# Altium PCB HVPSV3_GaN_system_5_5V_v2.PcbDoc (part 1 of 3)
Units mil, origin at the board's own origin, x right, y up, seen from the top; angles counter-clockwise.
Board outline 3914 x 4092 mil, 4 copper layers (Top Layer, Internal Plane 1, Internal Plane 2, Bottom Layer); 212 components, 159 nets, 925 pads, 655 vias.
Unrouted connection lines stored in the file: 4.
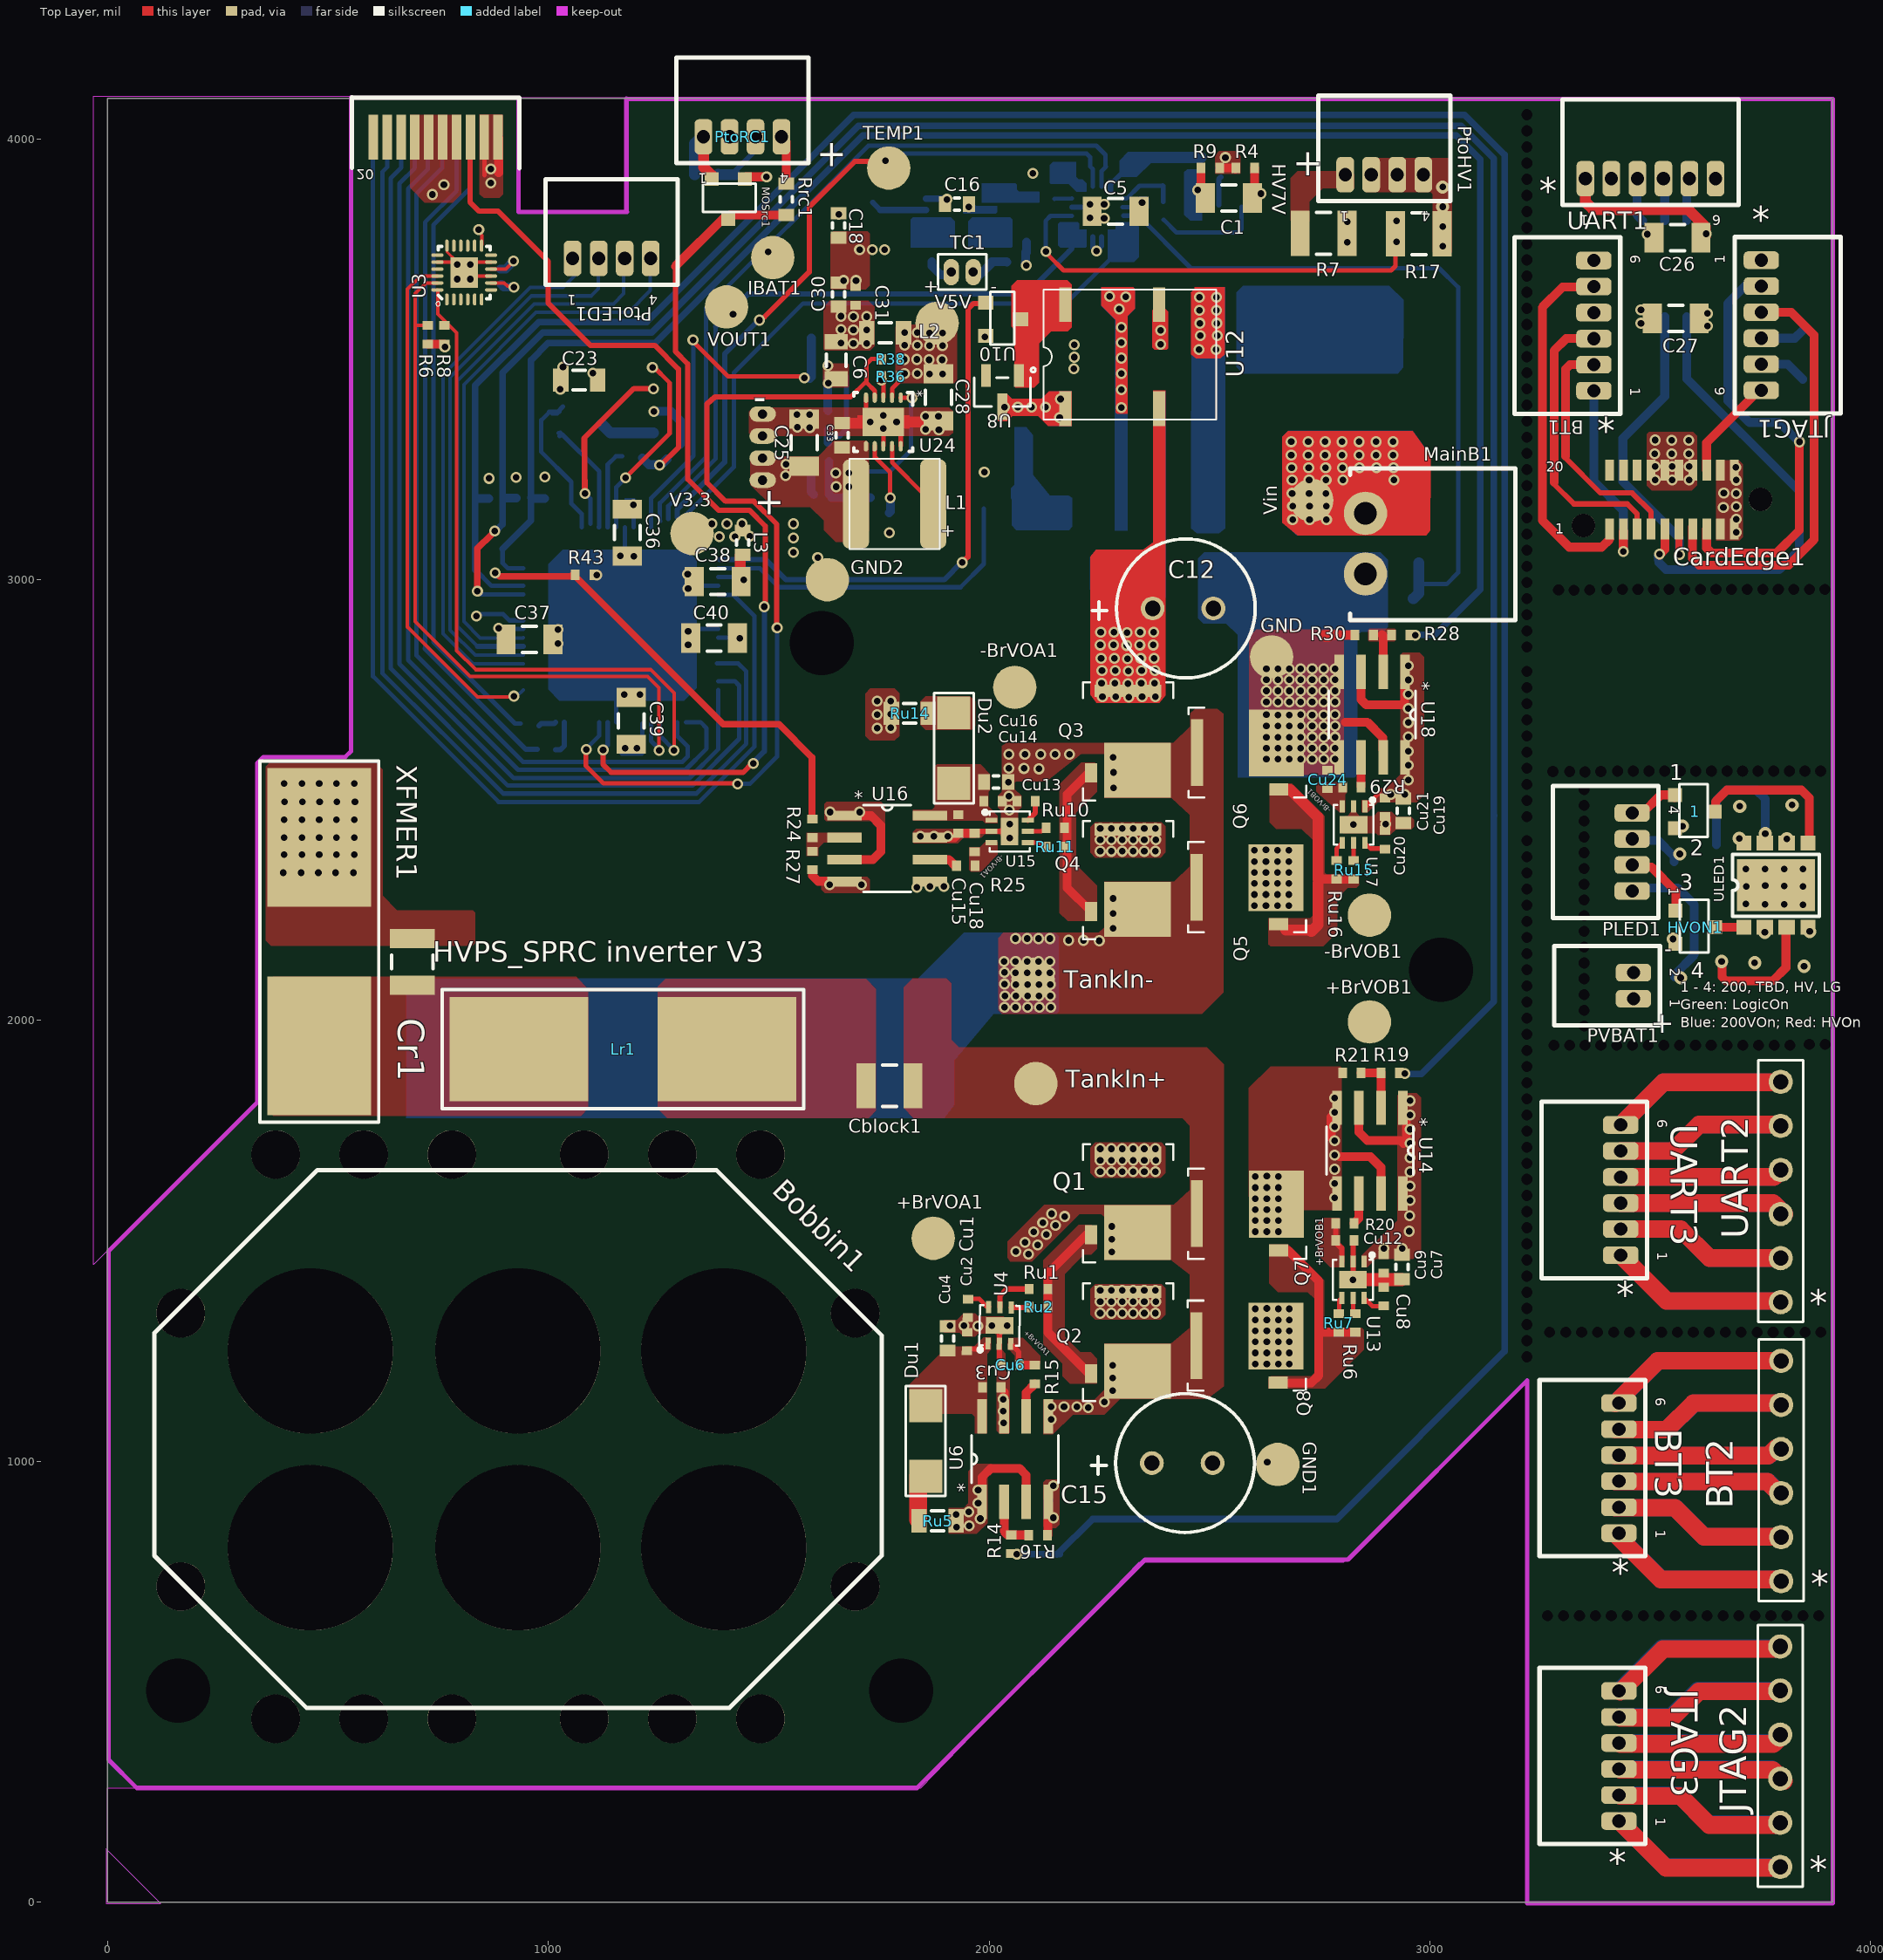
[diagram p0: Top Layer view]
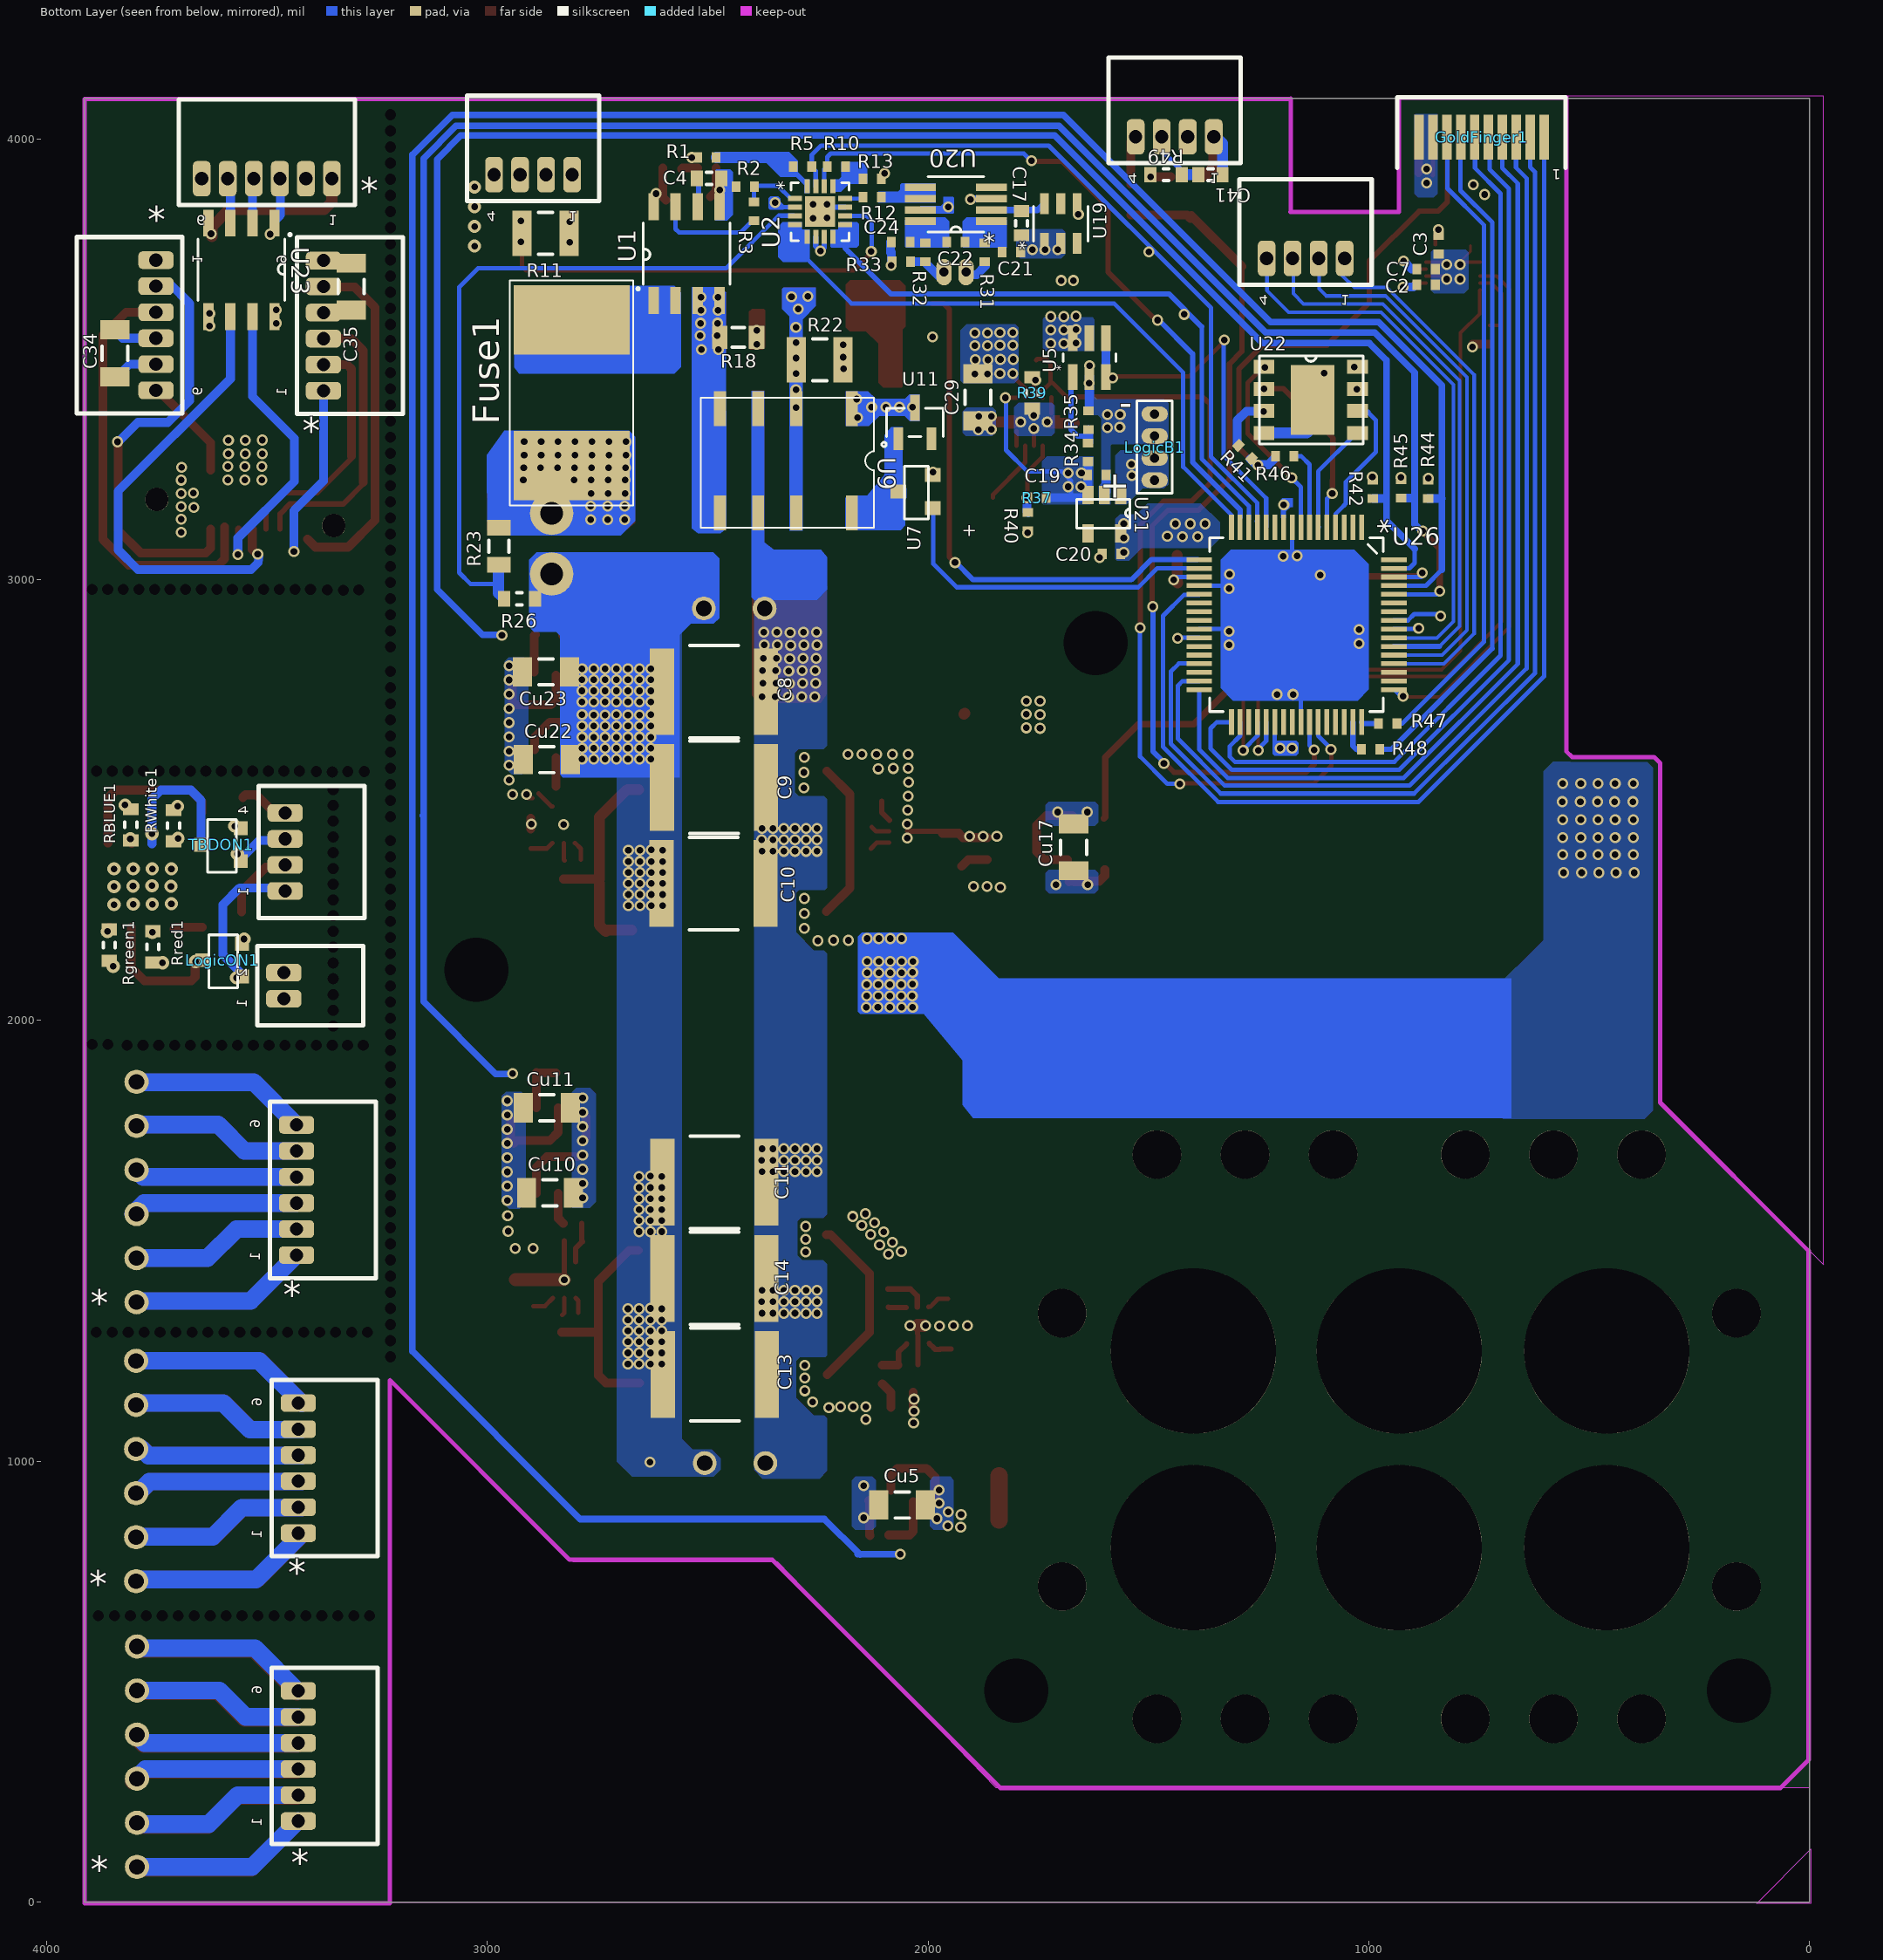
[diagram p1: Bottom Layer view, seen from below]
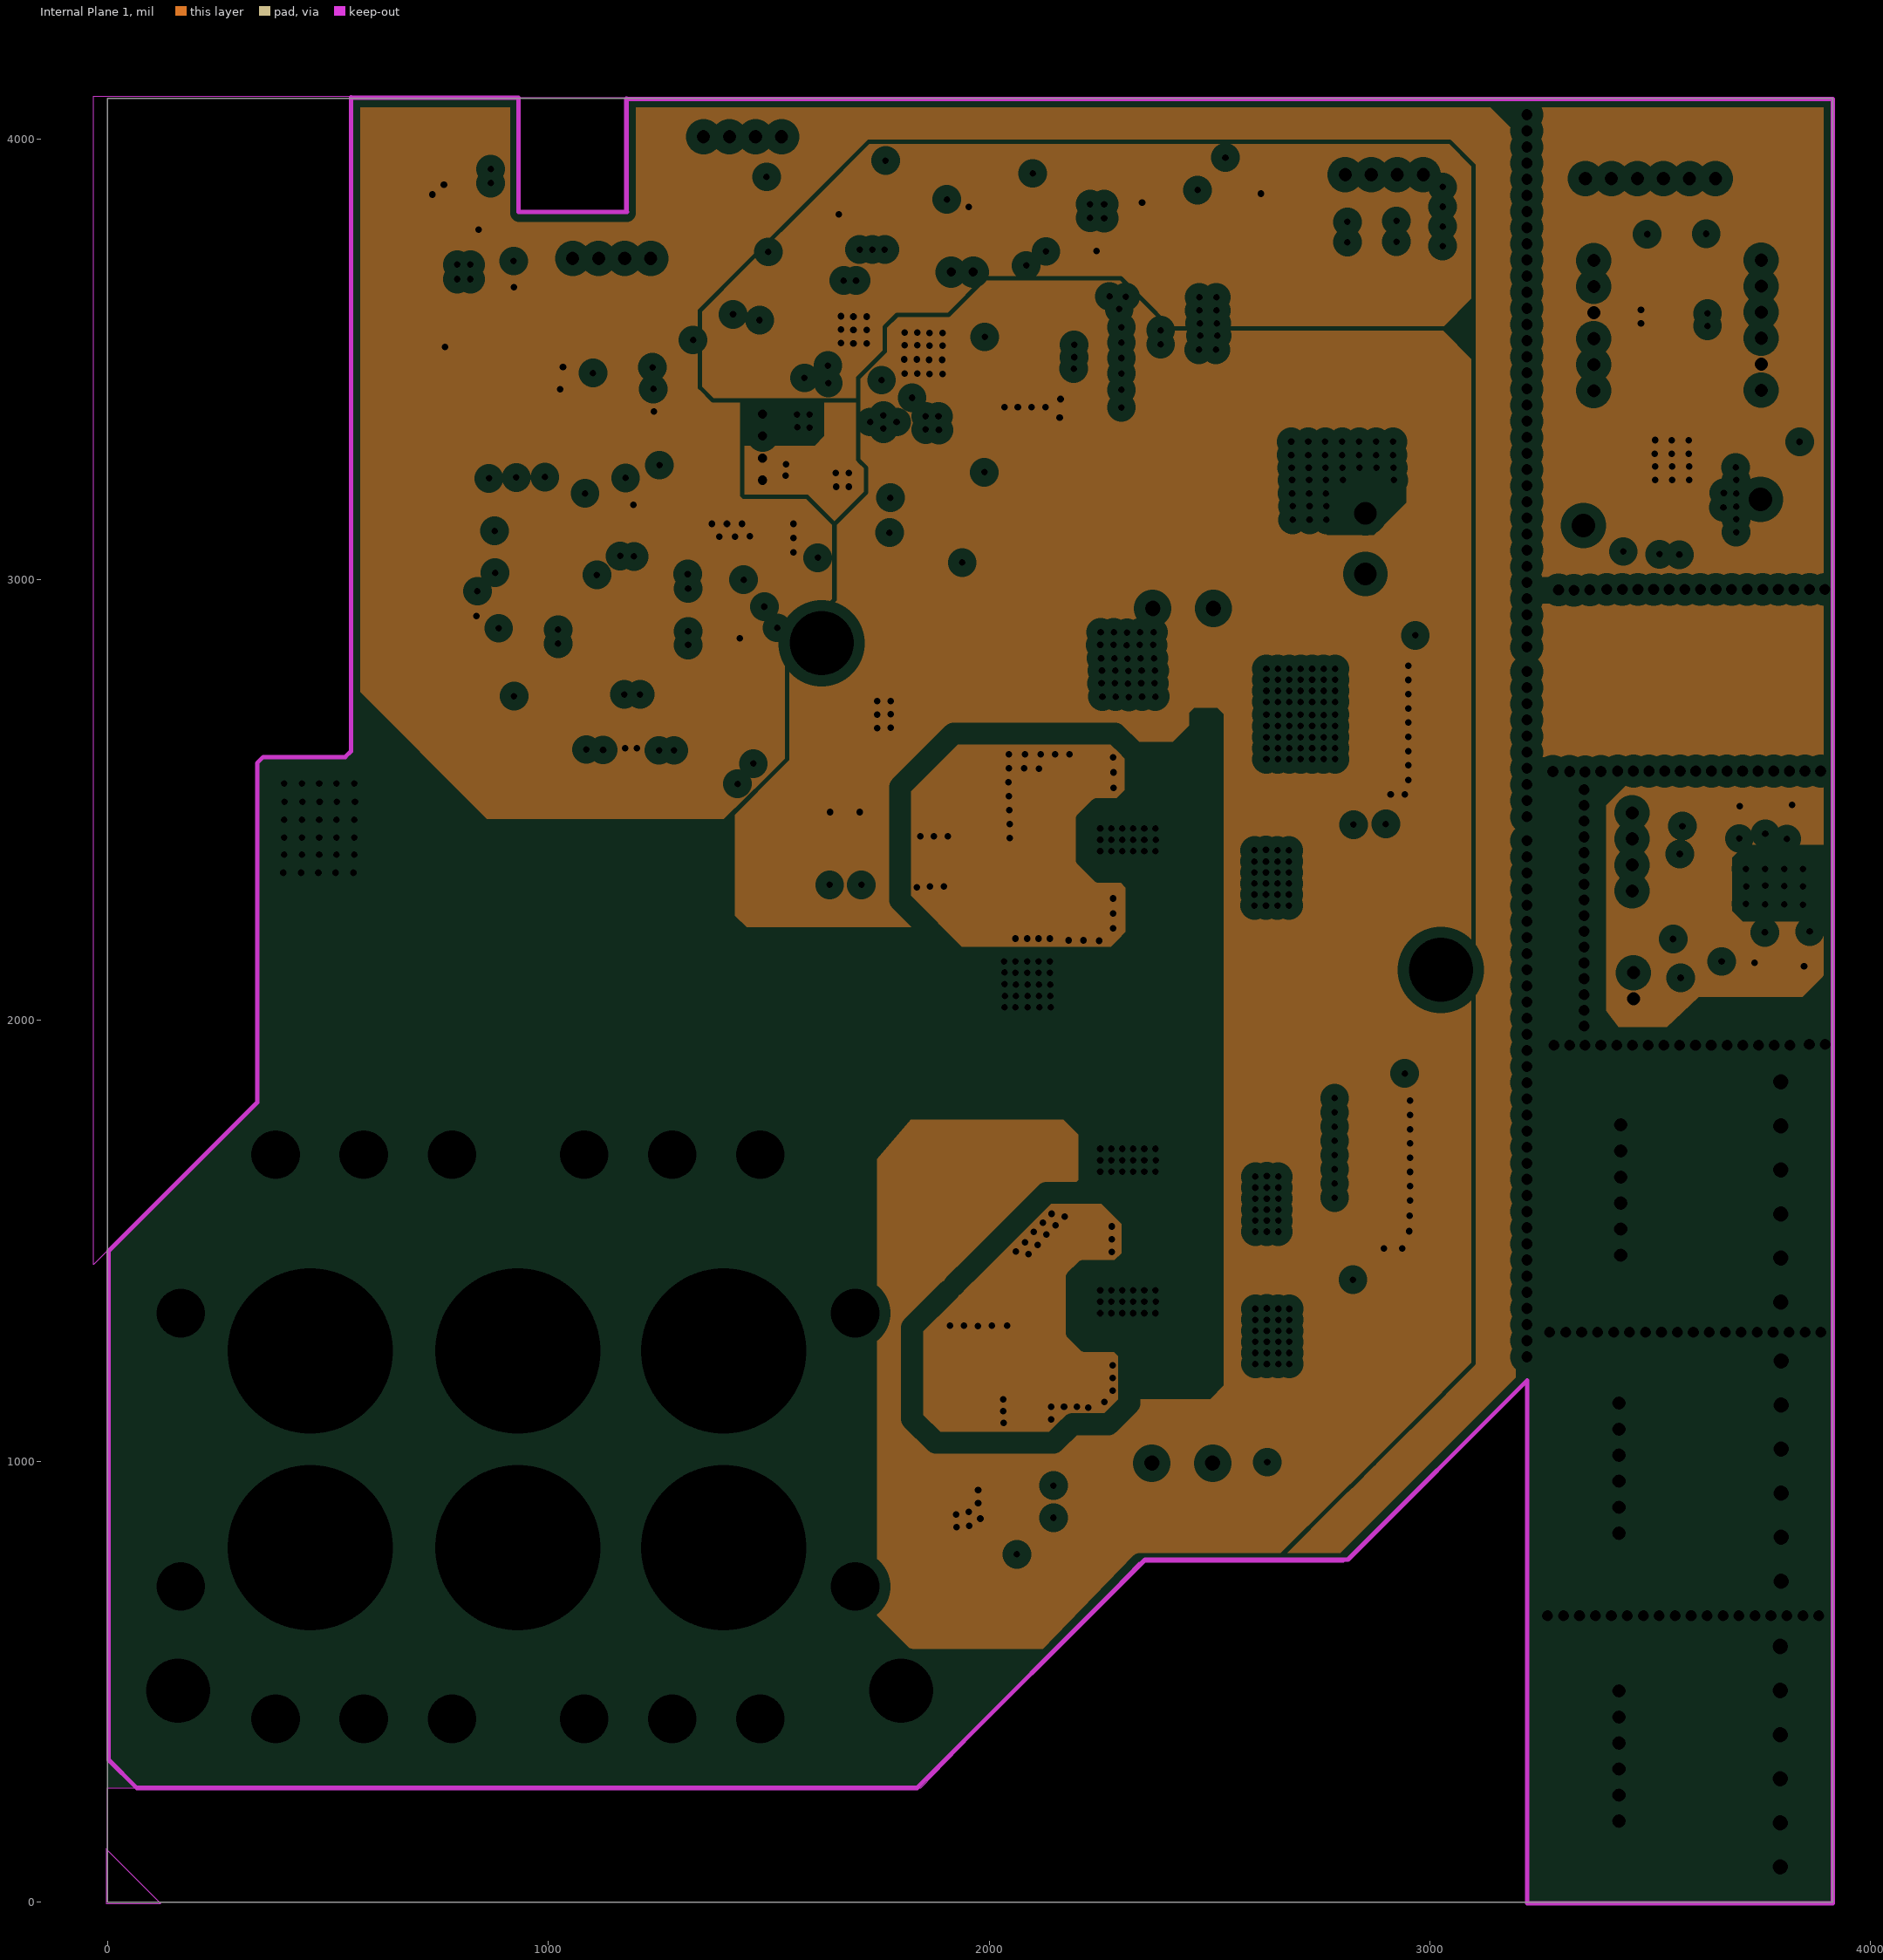
[diagram p2: Internal Plane 1, clearances drawn from the general rule]
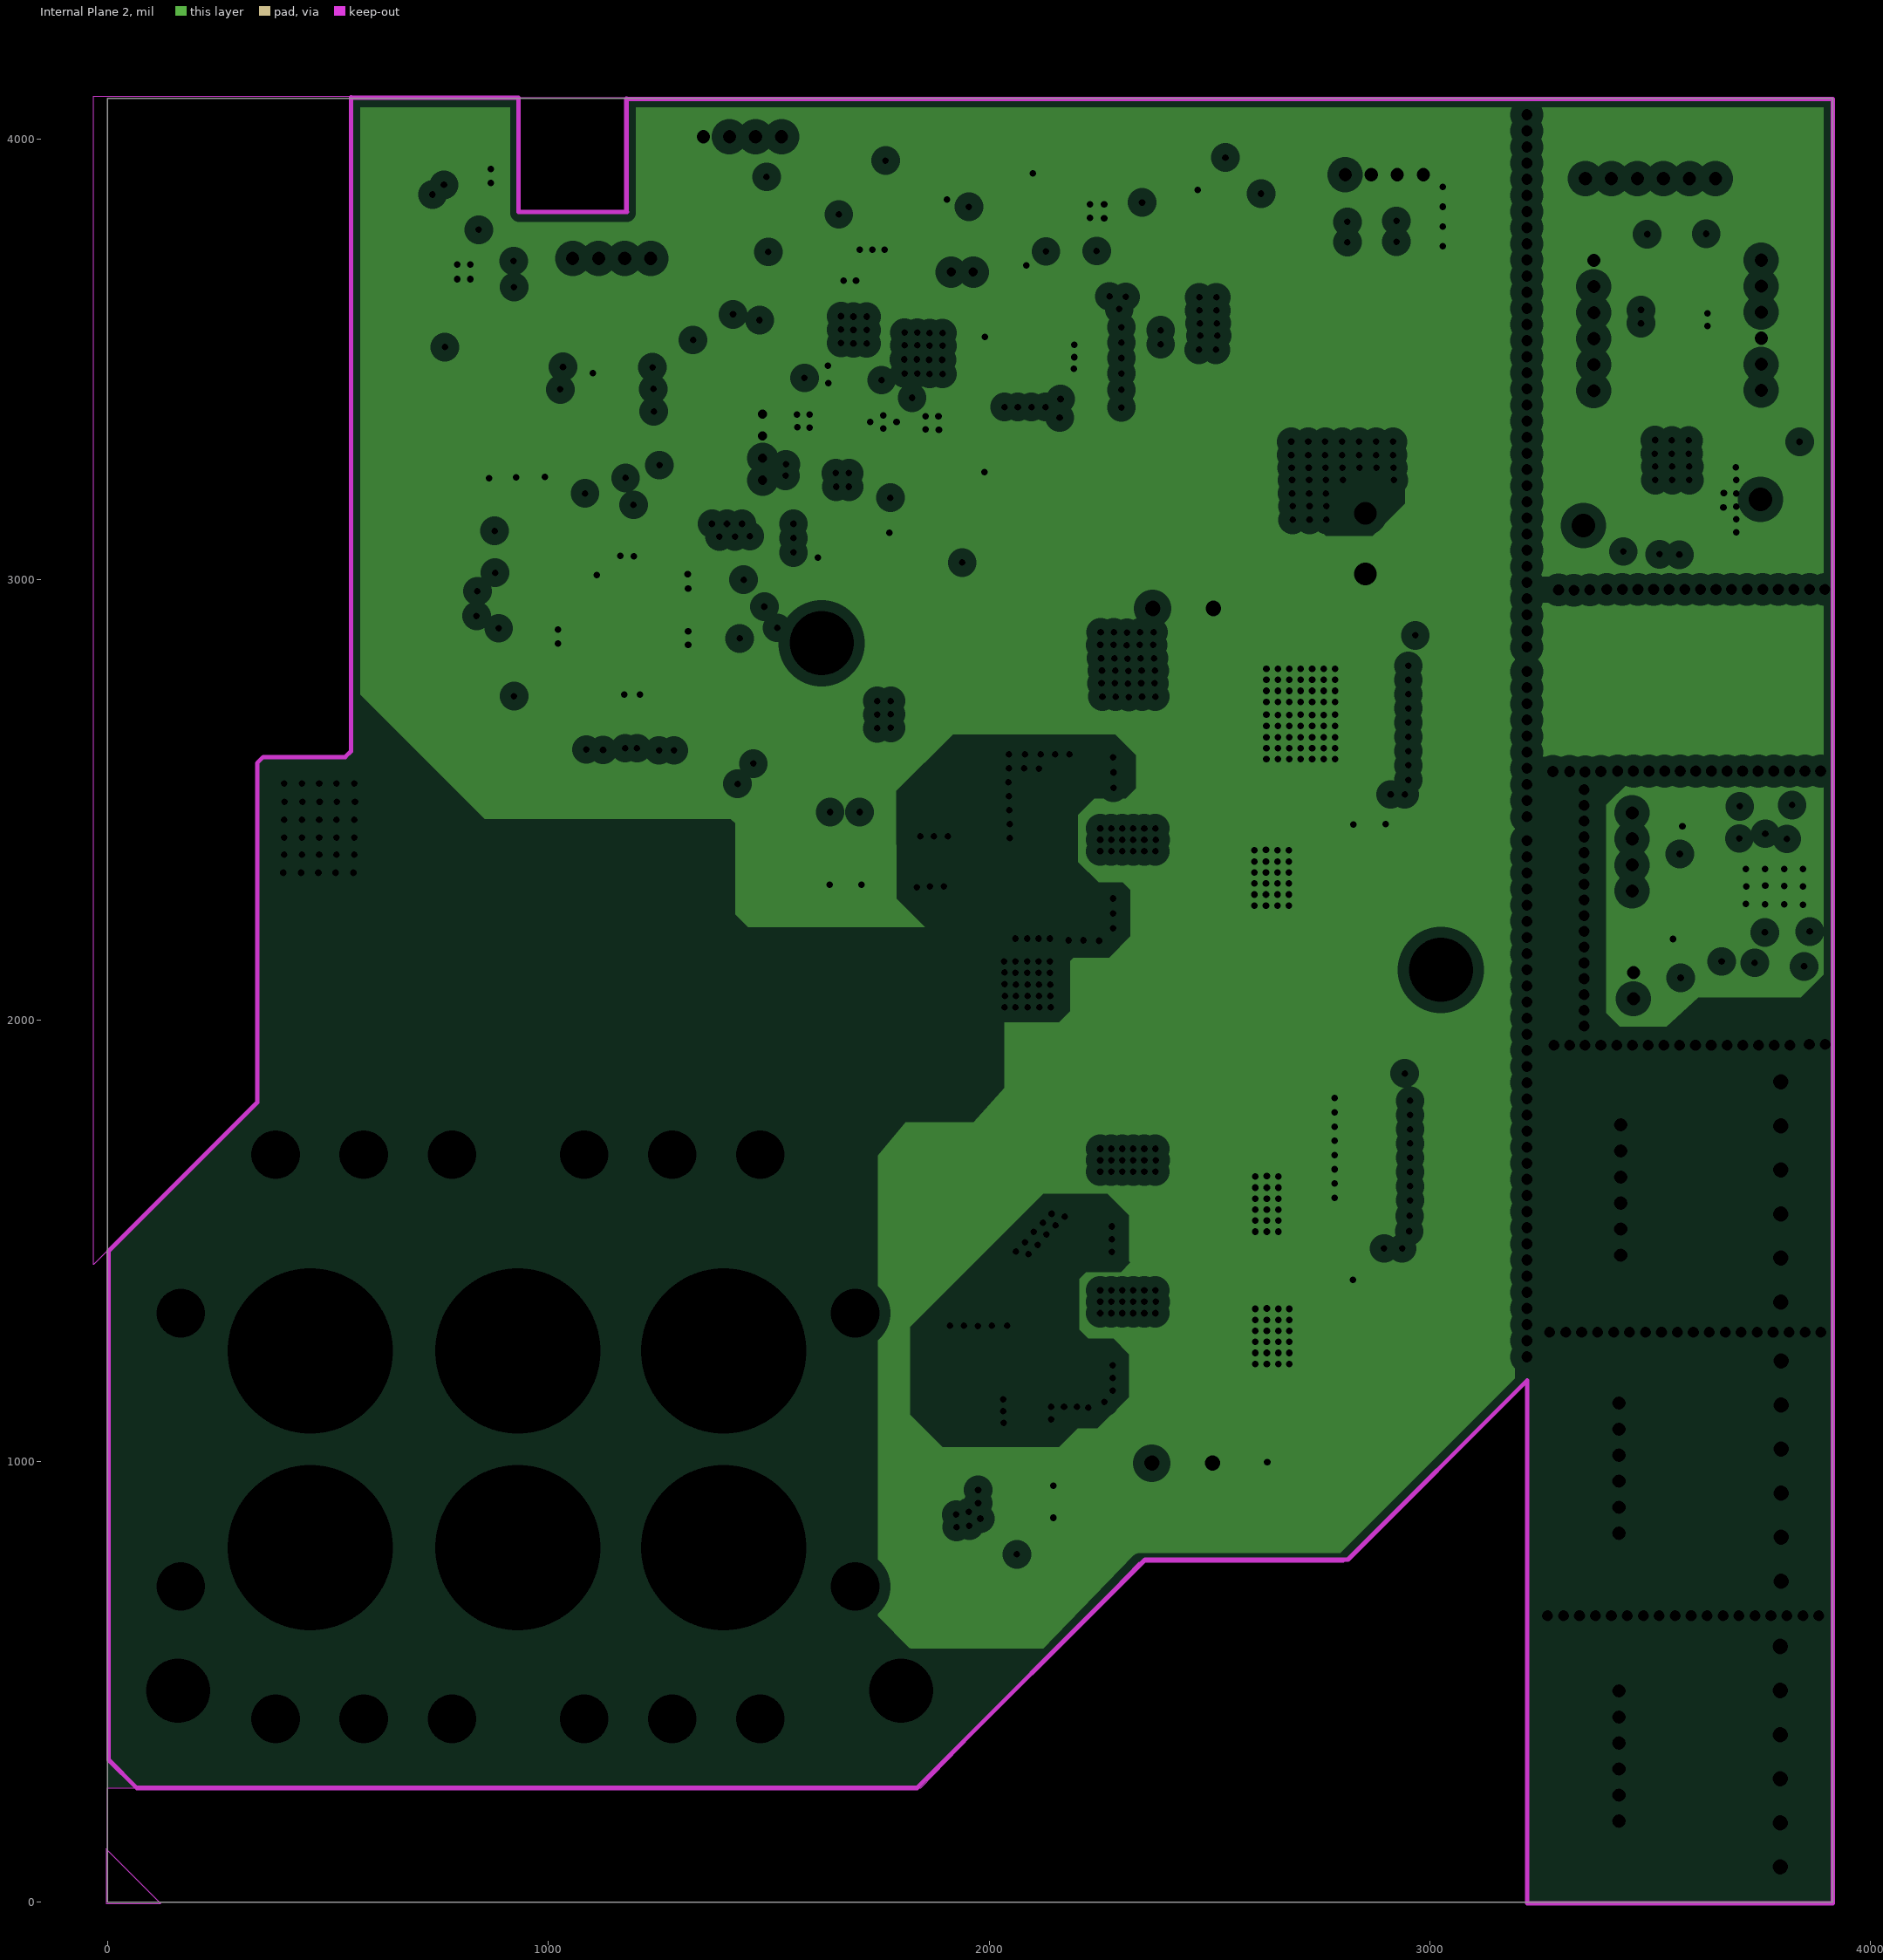
[diagram p3: Internal Plane 2, clearances drawn from the general rule]

## Layer stack, top to bottom
Top Solder: solder mask 0.4, Solder Resist, Dk 3.5
Top Layer: signal copper 1.4
Dielectric1: core 12.6, FR-4, Dk 4.8
Internal Plane 1: plane copper 1.4, net (Multiple Nets)
Dielectric3: core 12.6, FR-4, Dk 4.8
Internal Plane 2: plane copper 1.4, net (Multiple Nets)
Dielectric2: prepreg 12.6, FR-4, Dk 4.8
Bottom Layer: signal copper 1.4
Bottom Solder: solder mask 0.4, Solder Resist, Dk 3.5

## Board outline
0,0 0,4092 2395,4092 3914,4092 3914,0 2395,0
cut-out: -3,-3 120,-3 -3,120
cut-out: 553,2607 540,2594 352,2594 339,2581 339,1817 -32,1446 -32,4097 553,4097
cut-out: 1845,0 0,0 0,258.83 1845,258.83 2340.92,772 2805,772 3221,1188 3221,0 2291,0
cut-out: 933,3832 1178,3832 1178,4093 933,4093

## Design rules (kind name [scope] priority, off if disabled: settings)
Clearance "Clearance Polygon" [InPolygon] p1: gap=6 ignorepadtopadclearanceinfootprint=FALSE except(0: Arc-Hole Track-Hole SMDPad-Hole THPad-Hole Via-Hole Fill-Hole Poly-Hole Region-Hole Text-Hole)
Clearance [All] p2: gap=6 ignorepadtopadclearanceinfootprint=FALSE except(0: Arc-Hole Track-Hole SMDPad-Hole THPad-Hole Via-Hole Fill-Hole Poly-Hole Region-Hole Text-Hole)
ComponentClearance [All] p1: gap=0 collisioncheckmode=3 verticalgap=0 showdistances=FALSE
Height [All] p1: minheight=0 maxheight=1181.1 prefheight=1000
HoleSize [All] p1: absolutevalues=TRUE maxlimit=400 minlimit=10 maxpercent=80.000 minpercent=20.000
HoleToHoleClearance [All] p1: gap=6 allowstackedmicrovias=TRUE
MinimumAnnularRing [All] p1: minimumring=5
MinimumSolderMaskSliver [All] p1: minsoldermaskwidth=1
PasteMaskExpansion [All] p1: expansion=5
PlaneClearance [All] p1: clearance=25
PlaneConnect [All] p1: planeconnectstyle=Direct reliefexpansion=20 reliefentries=4 reliefconductorwidth=10 reliefairgap=10
PolygonConnect [All] p1: connectstyle=Direct reliefconductorwidth=10 reliefentries=4 polygonreliefangle="90 Angle" airgapwidth=10
RoutingVias [All] p1: holewidth=28 width=50 viastyle="Through Hole" minholewidth=28 minwidth=50 maxholewidth=28 maxwidth=50
SilkToSilkClearance [All] p1: silktosilkclearance=1
SilkToSolderMaskClearance [IsPad] p1: minsilkscreentomaskgap=0 clearancetoexposedcopper=TRUE
SolderMaskExpansion [All] p1: expansion=4
Width [All] p1: maxlimit=100 minlimit=6 preferedwidth=10
20 further rules are at their usual default settings.

## Components (designator, comment, footprint, x,y, rotation, side; value= is the part's Value field where it differs from the comment)
1 "MOSFET 20V 1.3 A" "SOT23 SUPER" 3555.84,2436.6 r180 top
+BrVOA1 "1508-0-57-15-00-00-03-0" TestPoint-MillMaxPin 1873,1506 r270 top
+BrVOB1 "1508-0-57-15-00-00-03-0" TestPoint-MillMaxPin 2863,1997 r270 top
-BrVOA1 "1508-0-57-15-00-00-03-0" TestPoint-MillMaxPin 2058,2756 r270 top
-BrVOB1 "1508-0-57-15-00-00-03-0" TestPoint-MillMaxPin 2863,2239 r270 top
Bobbin1 "Bobbin 2 end" "RM14 Bobbin - shrink" 931,356 r180 top
BT1 "6Pin" "S6B-ZR CONNECTOR" 3372,3576.64 r270 top
BT2 "6Pin" "6 pin Terminal - pitch 2.54mm" 3797,1228 r90 top
BT3 "6Pin" "S6B-ZR CONNECTOR" 3429,984.53 r270 top
C1 "0.1u" C1206 2544,3866 r180 top value=Value
C2 "0.1u" CAP0402 870,3669 r180 bottom value=Value
C3 "10n" CAP0402 842,3760 r270 bottom value=Value
C4 "0.1u" CAP0603 2497,3911 r180 bottom value=Value
C5 "0.1u" C1206 2287,3836 r180 top value=Value
C6 "0.1u" IND0805 1653,3498 r270 top value=Value
C7 "0.1u" CAP0402 870,3705 r180 bottom value=Value
C8 "1u" C2220 2486,2746 r0 bottom value=Value
C9 "1u" C2220 2486,2529 r0 bottom value=Value
C10 "1u" C2220 2487,2311 r0 bottom value=Value
C11 "1u" C2220 2485,1633 r0 bottom value=Value
C12 "CapEle" "ELECCAP - 3.5 MM SPACE" 2508.8,2935 r180 top value="NO NEED"
C13 "1u" C2220 2484,1197 r0 bottom value=Value
C14 "1u" C2220 2485,1415 r0 bottom value=Value
C15 "CapEle" "ELECCAP - 3.5 MM SPACE" 2507,996 r180 top value="NO NEED"
C16 "0.1u" CAP0603 1927,3852 r180 top value=Value
C17 "1u" CAP0603 1788,3809 r270 bottom value=Value
C18 "0.1u" CAP0603 1658,3804 r270 top value=Value
C19 "1u" CAP0402 1617,3238 r180 bottom value=Value
C20 "1u" CAP0402 1584,3059 r0 bottom value=Value
C21 "10n" CAP0402 1811,3743 r0 bottom value=Value
C22 "0.1u" CAP0402 1937,3766 r0 bottom value=Value
C23 "0.1u" IND0805 1070,3453 r0 top value=Value
C24 "10n" CAP0402 2062,3766 r0 bottom value=Value
C25 "22u" C1206 1580,3311 r90 top
C26 "47n" C1206 3562,3776 r180 top value=Value
C27 "47n" C1206 3558,3593 r0 top value=Value
C28 "2.2u" C1206 1885,3414 r270 top value=Value
C29 "68u" C1206 1887,3414 r270 bottom value=Value
C30 "0.1u" CAP0603 1658,3647 r90 top value=Value
C31 "1u" CAP0402 1697,3644 r90 top value=Value
C33 "0.1u" CAP0603 1666,3328 r90 top value=Value
C34 "0.1u" C1206 3845,3513.85 r270 bottom value=Value
C35 "0.1u" C1206 3309,3665 r90 bottom value=Value
C36 "0.1u" C1206 1179,3107 r270 top value=Value
C37 "22u" C1206 957,2865 r0 top value=Value
C38 "0.1u" C1206 1384,2996 r180 top value=Value
C39 "0.1u" C1206 1188,2680 r270 top value=Value
C40 "0.1u" C1206 1376,2868 r0 top value=Value
C41 "NaN" CAP0603 1359.44,3919 r180 bottom value=Value
CardEdge1 "Card Edge 20 Pin" 3MCARDEDGE20PIN_CONNECTOR 3549.27,3182.07 r0 top
Cblock1 "19.6nF" C1210 1774,1852 r180 top value=Value
Cr1 "NO NEED" C1210 691,2133 r270 top value=Value
Cu1 "2.2u" 0402 1952,1347 r269 top value=Value
Cu2 "2.2u" 0402 1950,1272 r89 top value=Value
Cu3 "0.1u" CAP0402 2006,1168 r0 top value=Value
Cu4 "10u" CAP0603 1906,1279 r90 top value=Value
Cu5 "0.1u" C1206 2059,901 r0 bottom value=Value
Cu6 "NaN" 0402 2048,1219 r179 top value=Value
Cu7 "10u" CAP0603 2937,1441 r270 top value=Value
Cu8 "2.2u" 0402 2895,1374 r90 top value=Value
Cu9 "2.2u" 0402 2895,1448 r270 top value=Value
Cu10 "0.1u" C1206 2858,1609 r180 bottom value=Value
Cu11 "0.1u" C1206 2865,1802 r180 bottom value=Value
Cu12 "NaN" 0402 2807,1501 r0 top value=Value
Cu13 "2.2u" 0402 2084,2498 r180 top value=Value
Cu14 "2.2u" 0402 2009,2498 r0 top value=Value
Cu15 "0.1u" CAP0402 1930,2446 r270 top value=Value
Cu16 "10u" CAP0603 2016,2541 r0 top value=Value
Cu17 "0.1u" C1206 1670,2393 r270 bottom value=Value
Cu18 "NaN" 0402 1967,2404 r90 top value=Value
Cu19 "10u" CAP0603 2940,2476 r270 top value=Value
Cu20 "2.2u" 0402 2898,2410 r90 top value=Value
Cu21 "2.2u" 0402 2898,2484 r270 top value=Value
Cu22 "0.1u" C1206 2865,2592 r180 bottom value=Value
Cu23 "0.1u" C1206 2867,2791 r180 bottom value=Value
Cu24 "NaN" 0402 2768,2547 r90 top value=Value
Du1 "Diode RF101LAM4S" SBR1U400P1 1856,966 r270 top
Du2 "Diode RF101LAM4S" SBR1U400P1 1920,2698 r90 top
Fuse1 "04853.15DR" LITTLEFUSE462 2809,3424 r270 bottom
GND "1508-0-57-15-00-00-03-0" TestPoint-MillMaxPin 2641,2825 r0 top
GND1 "1508-0-57-15-00-00-03-0" TestPoint-MillMaxPin 2655,993 r90 top
GND2 "1508-0-57-15-00-00-03-0" TestPoint-MillMaxPin 1633,3000 r90 top
GoldFinger1 "Card Edge 20 Pin" 3MCARDEDGE20PIN_BOARD 744.27,4004 r0 bottom
HVON1 "MOSFET 20V 1.3 A" "SOT23 SUPER" 3557,2174.2 r180 top
IBAT1 "1508-0-57-15-00-00-03-0" TestPoint-MillMaxPin 1509,3731 r90 top
JTAG1 "6Pin" "S6B-ZR CONNECTOR" 3752,3577.53 r90 top
JTAG2 "6Pin" "6 pin Terminal - pitch 2.54mm" 3795,580 r90 top
JTAG3 "6Pin" "S6B-ZR CONNECTOR" 3429,331.47 r270 top
L1 "Inductor" SD25inductor 1785.4,3172 r0 top value=10u
L2 "10u" IND0805 1764,3560 r180 top value=Value
L3 "68nH" CAP0603 1441,3084 r270 top value=Value
LogicB1 "GRPB041VWCN-RC" "4 PIN TERMINAL - PITCH 1.27MM - RIGHT ANGLE" 1486,3126 r270 bottom
LogicON1 "MOSFET 20V 1.3 A" "SOT23 SUPER" 3556.84,2174.4 r180 bottom
Lr1 "Inductor" ExtInductor 1169,1935 r0 top value="33.2uH 6Apk"
MainB1 "0395021002" "Molex 395001002" 2854,3013 r90 top
MOSrc1 "MOSFET 20V 1.3 A" "SOT23 Super" 1370.6,3909.16 r90 top
PLED1 "S4B-ZR(LF)(SN)" "S4B-ZR CONNECTOR" 3459,2382.53 r270 top
PtoHV1 "S4B-ZR(LF)(SN)" "S4B-ZR CONNECTOR" 2896.42,3919 r180 top
PtoLED1 "S4B-ZR(LF)(SN)" "S4B-ZR CONNECTOR" 1143.47,3729 r180 top
PtoRC1 "S4B-ZR(LF)(SN)" "S4B-ZR connector" 1440.42,4005 r180 top
PVBAT1 "2Pin" "S2B-ZR CONNECTOR" 3462,2079 r270 top
Q1 "GS66504B-E01-MR" GS66504B 2315,1585.26 r0 top
Q2 "GS66504B-E01-MR" GS66504B 2315,1270.26 r0 top
Q3 "GS66504B-E01-MR" GS66504B 2315,2633.43 r0 top
Q4 "GS66504B-E01-MR" GS66504B 2315,2318.43 r0 top
Q5 "GS66504B-E01-MR" GS66504B 2585.25,2302.35 r90 top
Q6 "GS66504B-E01-MR" GS66504B 2586,2608 r90 top
Q7 "GS66504B-E01-MR" GS66504B 2585.74,1562 r90 top
Q8 "GS66504B-E01-MR" GS66504B 2584.74,1262.35 r90 top
R1 "Res" RES0402 2502,3958 r180 bottom value=33.2k
R2 "Res" RES0402 2415,3892 r0 bottom value=100k
R3 "Res" RES0402 2395,3836 r90 bottom value=33.2k
R4 "Res" RES0402 2581,3934 r0 top value=180k
R5 "Res" RES0402 2285,3937 r180 bottom value=100k
R6 "Res" RES0402 726,3556 r270 top value=10k
R7 "Res" C1210 2759,3786 r180 top value=3.01Mohm
R8 "Res" RES0402 764,3556 r270 top value=10k
R9 "Res" RES0402 2502,3934 r0 top value=180k
R10 "Res" RES0402 2208,3937 r180 bottom value=0
R11 "Res" C1210 2868,3786 r180 bottom value=3.01Mohm
R12 "Res" RES0402 2127,3868 r180 bottom value=0
R13 "Res" RES0402 2127,3910 r0 bottom value=NaN
R14 "Res" RES0402 2050,812 r90 top value=0
R15 "Res" RES0402 2104,1197 r90 top value=0
R16 "Res" RES0402 2111,832 r180 top value=NaN
R17 "Res" C1210 2975,3785 r180 top value=3.01Mohm
R18 "Res" IND0805 2431,3550 r0 bottom value=20k
R19 "Res" RES0402 2910,1881 r180 top value=0
R20 "Res" RES0402 2807,1540 r180 top value=0
R21 "Res" RES0402 2823,1881 r0 top value=NaN
R22 "Res" C1210 2246,3499 r0 bottom value=2M
R23 "Res" IND0805 2974,3076 r90 bottom value=499k
R24 "Res" RES0402 1599,2436 r270 top value=0
R25 "Res" RES0402 1947,2351 r0 top value=0
R26 "Res" RES0603 2927,2957 r0 bottom value=4.99k
R27 "Res" RES0402 1599,2363 r90 top value=NaN
R28 "Res" RES0402 2934,2875 r180 top value=0
R29 "Res" RES0402 2823,2529 r180 top value=0
R30 "Res" RES0402 2851,2875 r0 top value=NaN
R31 "Res" RES0402 1872,3743 r90 bottom value=100
R32 "Res" RES0402 2006,3743 r90 bottom value=100
R33 "Res" RES0402 2061,3722 r180 bottom value=1M
R34 "Res" RES0402 1637,3289 r270 bottom value=390k
R35 "Res" RES0402 1636,3362 r270 bottom value=390k
R36 "Res" RES0402 1777,3461 r0 top value=1.8M
R37 "Res" RES0402 1753,3186 r180 bottom value=1.91M
R38 "Res" RES0402 1777,3500 r0 top value=1M
R39 "Res" RES0603 1764,3424 r90 bottom value=180k
R40 "Res" RES0402 1774,3132 r90 bottom value=390k
R41 "Res" RES0402 1281,3290 r45 bottom value=10k
R42 "Res" RES0402 991,3205 r90 bottom value=100k
R43 "Res" RES0402 1082,3011 r0 top value=100k
R44 "Res" RES0402 865,3205 r90 bottom value=100k
R45 "Res" RES0402 927,3206 r90 bottom value=100k
R46 "Res" RES0402 1191,3280 r0 bottom value=220
R47 "Res" RES0402 957,2674 r180 bottom value=49.9ohm
R48 "Res" RES0402 996,2615 r180 bottom value="49.9 ohm"
R49 "Res" RES0603 1460,3919 r0 bottom value=0
RBLUE1 "Res" RES0603 3809,2444 r90 bottom value=270
Rgreen1 "Res" RES0603 3858,2171 r90 bottom value=270
Rrc1 "Res" RES0603 1540,3863 r90 top value=20
Rred1 "Res" RES0603 3759,2167 r90 bottom value=270
Ru1 "Res" 0402 2112,1391 r0 top value=10ohm
Ru2 "Res" 0402 2112,1350 r0 top value=10ohm
Ru5 "Res" IND0805 1883,865 r180 top value=0
Ru6 "Res" 0402 2831,1314 r270 top value=10ohm
Ru7 "Res" 0402 2793,1314 r270 top value=10ohm
Ru10 "Res" 0402 2150,2437 r0 top value=10ohm
Ru11 "Res" 0402 2150,2394 r0 top value=10ohm
Ru14 "Res" IND0805 1820,2697 r0 top value=0
Ru15 "Res" 0402 2827,2342 r270 top value=10ohm
Ru16 "Res" 0402 2788,2342 r270 top value=10ohm
RWhite1 "Res" RES0603 3712,2442 r90 bottom value=270
TankIn+ "1508-0-57-15-00-00-03-0" TestPoint-MillMaxPin 2106,1857 r90 top
TankIn- "1508-0-57-15-00-00-03-0" TestPoint-MillMaxPin 2099.7,2093.94 r90 top
TBDON1 "MOSFET 20V 1.3 A" "SOT23 SUPER" 3559.84,2436.4 r180 bottom
TC1 "0530480210" "2 PIN TERMINAL - PITCH 1.27MM - RIGHT ANGLE" 1964,3698 r0 top
TEMP1 "1508-0-57-15-00-00-03-0" TestPoint-MillMaxPin 1772,3934 r90 top
U1 "ACS712ELCTR-05B-T" SOIC-8 2548,3740 r90 bottom
U2 "ADA4691-4ACPZ-R2" CP_16_22 2245.18,3835.16 r90 bottom value=Value
U3 "MPU-9250" QFN40P300X300X105-25N 809,3697 r90 top
U4 "UCC27611DRV" WSON-N6 2023.81,1308.23 r89 top
U5 "TLV341AIDBVR" DBV6 1634,3504 r90 bottom value=Value
U6 "SI8610BB-B-IS" D8 2059,1005 r90 top value=Value
U7 "DRDC3105F-7" SOT23 1989,3237.8 r180 bottom
U8 "PLVA650A,215" "SOT23 - ZENERDIODE" 2030,3426 r180 top value=Value
U9 "9-1462038-8" GULLWING8PIN 2173,3388 r270 bottom
U10 "DRDC3105F-7" SOT23 1992.26,3553.6 r180 top
U11 "PLVA650A,215" "SOT23 - ZENERDIODE" 2030,3357 r180 bottom value=Value
U12 "1462041-7" GULLWING4PIN 2173,3388 r90 top
U13 "UCC27611DRV" WSON-N6 2825.53,1411.9 r270 top
U14 "SI8610BB-B-IS" D8 2864,1705 r270 top value=Value
U15 "UCC27611DRV" WSON-N6 2046.56,2429.06 r0 top
U16 "SI8610BB-B-IS" D8 1769,2390 r0 top value=Value
U17 "UCC27611DRV" WSON-N6 2826.82,2444.44 r270 top
U18 "SI8610BB-B-IS" D8 2869,2694 r270 top value=Value
U19 "LT6654AHS6-1.25#" TSOT-23_S6 1699,3808 r90 bottom value=Value
U20 "AD8497ARMZ" RM_8 1937,3852 r0 bottom value=Value
U21 "AP2112-3.3TRG1" SOT23-5 1562.6,3192 r270 bottom
U22 "CY15B104Q-LHX1" DFN-8PIN 1238,3483 r180 bottom
U23 "HCPL-0931" SOIC-8 3558,3703 r270 bottom
U24 "TPS61020DRCR" DRC0010A 1760,3358 r270 top value=Value
U26 "dsPIC33FJ64GS606" TQFP64_10X10MC 1164,2898 r270 bottom
UART1 "6Pin" "S6B-ZR CONNECTOR" 3500.47,3910 r180 top
UART2 "6Pin" "6 pin Terminal - pitch 2.54mm" 3796,1861 r90 top
UART3 "6Pin" "S6B-ZR CONNECTOR" 3433,1615.53 r270 top
ULED1 "00137402" LED00137402 3785,2307 r90 top
V3.3 "1508-0-57-15-00-00-03-0" TestPoint-MillMaxPin 1326,3105 r90 top
V5V "1508-0-57-15-00-00-03-0" TestPoint-MillMaxPin 1882,3582 r0 top
Vin "1508-0-57-15-00-00-03-0" TestPoint-MillMaxPin 2732,3180 r0 top
VOUT1 "1508-0-57-15-00-00-03-0" TestPoint-MillMaxPin 1404,3619 r90 top
XFMER1 "XfmerCON" ExtInductor 480,2179 r90 top

## Footprints (in the part's own frame and the unit in brackets; to place one, negate y for a bottom-side part, rotate by r counter-clockwise, add the part's x,y. Pads: shape width x height; smd on the part's side, far side on the other; paste and mask are expansions set on the pad)
"2 PIN TERMINAL - PITCH 1.27MM - RIGHT ANGLE" [mil] "Right angle, male pin"
  oval 35x60 hole 21: 1(-50,0) 2(0,0)
  silkscreen extent -80,-40 30,40, body extent -83,-7 33,322, height 102
3MCARDEDGE20PIN_BOARD [mm] "SPD08-020-RB-TR"
  rect 0.55x2.6 smd: 1(-3.6,0) 2(-2.8,0) 3(-2,0) 4(-1.2,0) 5(-0.4,0) 6(0.4,0) 7(1.2,0) 8(2,0) 9(2.8,0) 10(3.6,0)
  rect 0.55x2.6 smd far side: 11(3.6,0) 12(2.8,0) 13(2,0) 14(1.2,0) 15(0.4,0) 16(-0.4,0) 17(-1.2,0) 18(-2,0) 19(-2.8,0) 20(-3.6,0)
  silkscreen extent -4.85,-2.3 4.85,1.78, body extent -6.43,-4.98 6.17,4.32, height 3.5
3MCARDEDGE20PIN_CONNECTOR [mm] "SPD08-020-RB-TR"
  round 1.35 hole 1.35 paste+0 mask+0: 0(-5.1,-1.5) 0(5.1,0)
  rect 0.5x1.2 smd: 1(-3.6,-1.7) 2(-2.8,-1.7) 3(-2,-1.7) 4(-1.2,-1.7) 5(-0.4,-1.7) 6(0.4,-1.7) 7(1.2,-1.7) 8(2,-1.7) 9(2.8,-1.7) 10(3.6,-1.7) 11(3.6,1.7) 12(2.8,1.7) 13(2,1.7) 14(1.2,1.7) 15(0.4,1.7) 16(-0.4,1.7) 17(-1.2,1.7) 18(-2,1.7) 19(-2.8,1.7) 20(-3.6,1.7)
  body extent -6.3,-3.5 6.3,3.5, height 8
"4 PIN TERMINAL - PITCH 1.27MM - RIGHT ANGLE" [mil] "Right angle, male pin"
  oval 35x60 hole 21: 1(-250,0) 2(-200,0) 3(-150,0) 4(-100,0)
  silkscreen extent -280,-40 -70,40, body extent -281,-7 -65,365, height 94
"6 pin Terminal - pitch 2.54mm" [mil] "Right angle, male pin"
  round 55 / inner round 60 / far side round 55 hole 35: 0(-500,0) 1(-400,0) 2(-300,0) 3(-200,0) 4(-100,0) 5(0,0)
  silkscreen extent -545,-51 49,51, body extent -539,-46 49,46, height 395
0402 [mil] "Chip Resistor, 2-Leads, Body 1.0x0.5mm, IPC Medium Density"
  rect 20x23.62 smd: 1(-21,0) 2(21,0)
  body extent -21,-11 21,11, height 20
C1206 [mm] "Chip Capacitor, Body 3.2x1.6mm, IPC High Density"
  rect 1.1x1.7 smd: 1(-1.35,0) 2(1.35,0)
  silkscreen extent -0.4,-0.75 0.4,0.75, body extent -1.7,-0.9 1.7,0.9, height 1.3
C1210 [mm] "Chip Capacitor, Body 3.2x2.5mm, IPC High Density"
  rect 1.1x2.6 smd: 1(-1.35,0) 2(1.35,0)
  silkscreen extent -0.4,-1.2 0.4,1.2, body extent -1.7,-1.35 1.7,1.35, height 1.3
C2220 [mm] "Chip Capacitor, Body 5.7x5mm, IPC High Density"
  rect 1.4x5 smd: 1(-3,0) 2(3,0)
  silkscreen extent -1.4,-2.67 1.4,2.67, body extent -2.92,-2.67 2.92,2.67, height 2.5
CAP0402 [mil] "Chip Capacitor, 2-Leads, Body 1.0x0.5mm, IPC Medium Density"
  rect 20x23.62 smd: 1(-21,0) 2(21,0)
  body extent -21,-11 21,11, height 20
CAP0603 [mm] "Chip Capacitor, 2-Leads, Body 1.6x0.8mm, IPC Medium Density"
  rect 0.7x0.9 smd: 1(-0.7,0) 2(0.7,0)
  silkscreen extent -0.15,-0.35 0.15,0.35, body extent -0.82,-0.43 0.82,0.42, height 0.8
CP_16_22 [mm]
  rect 0.3x0.805 smd: 1(0.75,1.452) 2(0.25,1.452) 3(-0.25,1.452) 4(-0.75,1.452) 9(-0.75,-1.452) 10(-0.25,-1.452) 11(0.25,-1.452) 12(0.75,-1.452)
  rect 0.805x0.3 smd: 5(-1.452,0.75) 6(-1.452,0.25) 7(-1.452,-0.25) 8(-1.452,-0.75) 13(1.452,-0.75) 14(1.452,-0.25) 15(1.452,0.25) 16(1.452,0.75)
  rect 1.75x1.75 smd paste-0.862: HTAB(0,0)
  silkscreen extent -1.68,-1.68 1.68,1.68, body extent -1.65,-1.65 1.65,1.65, height 0.8
D8 [mil]
  rect 78x22 smd: 1(-97,75) 2(-97,25) 3(-97,-25) 4(-97,-75) 5(97,-75) 6(97,-25) 7(97,25) 8(97,75)
  silkscreen extent -54,-98 54,98
DBV6 [mil]
  rect 58x22 smd: 1(-44,37.4) 2(-44,0) 3(-44,-37.4) 4(44,-37.4) 5(44,0) 6(44,37.4)
  silkscreen extent -9,-60 9,60
DFN-8PIN [mm]
  rect 2.5x4 smd: 0(2.8,-1.905)
  rect 1.2x0.8 smd: 1(0,0) 2(0,-1.27) 3(0,-2.54) 4(0,-3.81) 5(5.4,-3.81) 6(5.4,-2.54) 7(5.4,-1.27) 8(5.4,0)
  silkscreen extent -0.25,-4.44 5.72,0.63, body extent -0.25,-4.44 5.72,0.63, height 0.8
DRC0010A [mm]
  oval 0.6x0.24 smd paste-0.102 mask+0.051: 1(-1.4,1) 2(-1.4,0.5) 3(-1.4,0) 4(-1.4,-0.5) 5(-1.4,-1) 6(1.4,-1) 7(1.4,-0.5) 8(1.4,0) 9(1.4,0.5) 10(1.4,1)
  round 0.635 / inner round 1.524 / far side round 0.635 hole 0.381 mask+0.051: 11(-0.381,0) 11(0,0.762) 11(0,-0.762) 11(0.381,0)
  rect 1.65x2.4 smd paste-1.187 mask+0.051: 11(0,0)
  Top Layer region: 0.135,1.5 0.135,1.1 0.365,1.1 0.365,1.5
  Top Layer region: -0.135,1.1 -0.135,1.5 -0.365,1.5 -0.365,1.1
  Top Layer region: -0.135,-1.5 -0.135,-1.1 -0.365,-1.1 -0.365,-1.5
  Top Layer region: 0.135,-1.1 0.135,-1.5 0.365,-1.5 0.365,-1.1
  silkscreen extent -1.7,-1.7 1.7,1.7
"ELECCAP - 3.5 MM SPACE" [mil]
  round 54 hole 35: 1(137.8,0) 2(0,0)
  silkscreen extent -95,-157 275,157, body extent -91,-162 222,152, height 709
ExtInductor [mm]
  rect 8x6 smd: 1(-6,0) 2(6,0)
  silkscreen extent -10.41,-3.43 10.41,3.43
GS66504B [mm] "GAN TRANS E-MODE 650V"
  rect 3.86x0.7 smd: D(0,2.91)
  rect 0.7x1.1 smd: G(-2.13,-1.81)
  rect 3.86x3.17 smd: S(0.55,-1.67)
  silkscreen extent -2.6,-3.4 2.6,3.4, body extent -2.5,-3.3 2.5,3.3, height 0.5
GULLWING4PIN [mm]
  rect 2x0.7 smd: 1(0,0) 3(0,-5.4) 6(6,-5.4) 8(6,0)
  silkscreen extent -0.64,-8.7 6.86,1.27, body extent -0.7,-8.94 6.8,1.06, height 5.65
GULLWING8PIN [mm]
  rect 2x0.7 smd: 1(0,0) 2(0,-3.2) 3(0,-5.4) 4(0,-7.6) 5(6,-7.6) 6(6,-5.4) 7(6,-3.2) 8(6,0)
  silkscreen extent -0.64,-8.7 6.86,1.27, body extent -0.84,-8.81 6.68,1.19, height 5.65
IND0805 [mil] "Chip Inductor 2-Leads, Body 2.0x1.2mm, IPC Medium Density"
  rect 35x53.15 smd: 1(-42,0) 2(42,0)
  silkscreen extent -14,-23 14,23, body extent -40,-25 40,25, height 49
LED00137402 [mm]
  rect 0.85x0.85 smd: 1(-2.425,1.845) 4(-2.425,-1.845) 5(2.425,-1.845) 8(2.425,1.845)
  rect 0.85x0.95 smd: 2(-2.425,0.625) 3(-2.425,-0.625) 6(2.425,-0.625) 7(2.425,0.625)
  rect 3x4.5 smd: 9(0,0)
  silkscreen extent -1.79,-2.5 1.77,2.5
LITTLEFUSE462 [mm]
  rect 4x6.68 smd: 1(-4.2,0) 2(4.2,0)
  silkscreen extent -6.48,-3.56 6.48,3.56, body extent -6.35,-3.56 6.48,3.56, height 4.5
"Molex 395001002" [mm]
  round 2.5 hole 1.3: 1(0,0) 2(3.5,0)
  silkscreen extent -2.67,-8.64 6.1,0.89, body extent -2.43,-18.92 5.98,0.76, height 7.68
QFN40P300X300X105-25N [mm]
  oval 0.7x0.2 smd paste-25.4: 1(-1.55,1) 2(-1.55,0.6) 3(-1.55,0.2) 4(-1.55,-0.2) 5(-1.55,-0.6) 6(-1.55,-1) 13(1.55,-1) 14(1.55,-0.6) 15(1.55,-0.2) 16(1.55,0.2) 17(1.55,0.6) 18(1.55,1)
  oval 0.2x0.7 smd paste-25.4: 7(-1,-1.55) 8(-0.6,-1.55) 9(-0.2,-1.55) 10(0.2,-1.55) 11(0.6,-1.55) 12(1,-1.55) 19(1,1.55) 20(0.6,1.55) 21(0.2,1.55) 22(-0.2,1.55) 23(-0.6,1.55) 24(-1,1.55)
  rect 1.75x1.6 smd mask-25.4: 25(0,0)
  silkscreen extent -1.93,-1.5 1.5,1.63
RES0402 [mil] "Chip Resistor, 2-Leads, Body 1.0x0.5mm, IPC Medium Density"
  rect 20x23.62 smd: 1(-21,0) 2(21,0)
  body extent -21,-11 21,11, height 20
RES0603 [mm] "Chip Resistor, 2-Leads, Body 1.6x0.8mm, IPC Medium Density"
  rect 0.7x0.9 smd: 1(-0.9,0) 2(0.9,0)
  silkscreen extent -0.15,-0.35 0.15,0.35, body extent -0.82,-0.43 0.82,0.42, height 0.8
"RM14 Bobbin - shrink" [mm]
  round 2.8 hole 2.8 paste+0 mask+0: 1(-3.81,-1.524) 1(-3.81,-34.036) 2(-19.431,-9.144) 2(-19.431,-24.892) 2(-13.97,-1.524) 2(-13.97,-34.036) 2(-8.89,-1.524) 2(-8.89,-34.036) 2(3.81,-1.524) 2(3.81,-34.036) 2(8.89,-1.524) 2(8.89,-34.036) 2(13.97,-1.524) 2(13.97,-34.036) 2(19.431,-9.144) 2(19.431,-24.892)
  round 9.525 hole 9.525 paste+0 mask+0: 4(-11.862,-11.379) 4(-11.862,-22.708) 4(0,-11.379) 4(0,-22.708) 4(11.963,-11.379) 4(11.963,-22.708)
  silkscreen extent -20.95,-33.15 20.95,-2.16, body extent -21.1,-38.46 21.1,2.54, height 29.98
RM_8 [mil]
  rect 70x17 smd: 1(-80.5,38.39) 2(-80.5,12.8) 3(-80.5,-12.8) 4(-80.5,-38.39) 5(80.5,-38.39) 6(80.5,-12.8) 7(80.5,12.8) 8(80.5,38.39)
  silkscreen extent -63,-63 63,63, body extent -65,-65 65,65, height 43
"S2B-ZR CONNECTOR" [mil] "2 pin JST ZH connector"
  rrect50% 40x80 hole 30: 1(29.53,0) 2(-29.53,0)
  silkscreen extent -90,-180 90,60, body extent -87,-210 90,53, height 157
"S4B-ZR CONNECTOR" [mil] "4 pin JST ZH connector"
  rrect50% 40x80 hole 30: 1(88.58,0) 2(29.53,0) 3(-29.53,0) 4(-88.58,0)
  silkscreen extent -150,-180 150,60, body extent -150,-212 148,56, height 157
"S4B-ZR connector" [mil] "4 pin JST ZH connector"
  rrect50% 40x80 hole 30: 1(88.58,0) 2(29.53,0) 3(-29.53,0) 4(-88.58,0)
  silkscreen extent -150,-180 150,60, body extent -150,-212 148,56, height 157
"S6B-ZR CONNECTOR" [mil] "6pin JST ZH connector"
  rrect50% 40x80 hole 30: 0(147.64,0) 1(88.58,0) 2(29.53,0) 3(-29.53,0) 4(-88.58,0) 5(-147.64,0)
  silkscreen extent -200,-180 200,60, body extent -207,-218 207,51, height 157
SBR1U400P1 [mil]
  rect 75x75 smd: A(0,0) K(-160,0)
  silkscreen extent -205,-45 45,45
SD25inductor [mm] "http://www.cooperindustries.com/content/dam/public/bussmann/Electronics/Resources/product-datasheets/BUS_Elx_PM_4311_SD_Series_High_Power_Density.pdf"
  rrect50% 1.5x5.15 smd: 1(-2.225,0) 2(2.225,0)
  silkscreen extent -2.6,-2.6 2.6,2.6
SOIC-8 [mm]
  rect 1.55x0.6 smd: 1(-2.7,1.905) 2(-2.7,0.635) 3(-2.7,-0.635) 4(-2.7,-1.905) 5(2.7,-1.905) 6(2.7,-0.635) 7(2.7,0.635) 8(2.7,1.905)
  silkscreen extent -2.11,-2.5 1.77,2.87, body extent -1.99,-2.5 1.99,2.5, height 1.75
SOT23 [mm] "3 PIN"
  rect 0.9x0.8 smd: 1(0,0) 2(-2,-0.95) 3(0,-1.9)
  silkscreen extent -1.65,-2.54 -0.25,0.51, body extent -1.65,-2.54 -0.25,0.51, height 1
"SOT23 - ZENERDIODE" [mil]
  rect 22x52 smd: 1(-37.5,-37.21) 2(37.5,-37.21)
  rect 22x59.71 smd: 3(0,33.36)
  silkscreen extent -75,-55 64,33, body extent -65,-35 65,35, height 39
"SOT23 SUPER" [mm] "3 PIN"
  rect 0.8x0.8 smd: 1(0,0) 2(-2.29,-0.95) 3(0,-1.9)
  silkscreen extent -1.91,-2.54 -0.25,0.51, body extent -1.84,-2.54 -0.44,0.51, height 1
"SOT23 Super" [mm] "3 PIN"
  rect 0.8x0.8 smd: 1(0,0) 2(-2.29,-0.95) 3(0,-1.9)
  silkscreen extent -1.91,-2.54 -0.25,0.51, body extent -1.84,-2.54 -0.44,0.51, height 1
SOT23-5 [mm]
  rect 1.06x0.65 smd: 1(0,0) 2(0,-0.95) 3(0,-1.9) 4(2.2,-1.9) 5(2.2,0)
  silkscreen extent 0.25,-2.54 1.91,0.51, body extent 0.25,-2.54 1.91,0.51, height 1.45
TestPoint-MillMaxPin [mm] "MillMaxPin 1508 round male pin"
  round 2.5 smd: 0(0,0)
  body extent -1.27,-1.27 1.27,1.27, height 4.32
TQFP64_10X10MC [mil]
  rect 58x11 smd: 1(-221,147.64) 2(-221,127.95) 3(-221,108.27) 4(-221,88.58) 5(-221,68.9) 6(-221,49.21) 7(-221,29.53) 8(-221,9.84) 9(-221,-9.84) 10(-221,-29.53) 11(-221,-49.21) 12(-221,-68.9) 13(-221,-88.58) 14(-221,-108.27) 15(-221,-127.95) 16(-221,-147.64) 33(221,-147.64) 34(221,-127.95) 35(221,-108.27) 36(221,-88.58) 37(221,-68.9) 38(221,-49.21) 39(221,-29.53) 40(221,-9.84) 41(221,9.84) 42(221,29.53) 43(221,49.21) 44(221,68.9) 45(221,88.58) 46(221,108.27) 47(221,127.95) 48(221,147.64)
  rect 11x58 smd: 17(-147.64,-221) 18(-127.95,-221) 19(-108.27,-221) 20(-88.58,-221) 21(-68.9,-221) 22(-49.21,-221) 23(-29.53,-221) 24(-9.84,-221) 25(9.84,-221) 26(29.53,-221) 27(49.21,-221) 28(68.9,-221) 29(88.58,-221) 30(108.27,-221) 31(127.95,-221) 32(147.64,-221) 49(147.64,221) 50(127.95,221) 51(108.27,221) 52(88.58,221) 53(68.9,221) 54(49.21,221) 55(29.53,221) 56(9.84,221) 57(-9.84,221) 58(-29.53,221) 59(-49.21,221) 60(-68.9,221) 61(-88.58,221) 62(-108.27,221) 63(-127.95,221) 64(-147.64,221)
  silkscreen extent -197,-197 197,197, body extent -200,-200 195,200, height 47
TSOT-23_S6 [mil]
  rect 48x20 smd: 1(-45,37.4) 2(-45,0) 3(-45,-37.4) 4(45,-37.4) 5(45,0) 6(45,37.4)
  silkscreen extent -40,-62 40,62
WSON-N6 [mm]
  rect 0.7x0.3 smd paste-0.025 mask+0.07: 1(-1.05,0.65) 2(-1.05,0) 3(-1.05,-0.65) 4(1.05,-0.65) 5(1.05,0) 6(1.05,0.65)
  rect 1x1.6 smd paste-0.1 mask+0.07: EP(0,0)
  silkscreen extent -1.51,-1.15 1.15,1.19, body extent -1.05,-1.05 1.05,1.05, height 0.8

## Part data
1 HVON1 LogicON1 MOSrc1 TBDON1: library part NDS331N, Component Link=https://www.fairchildsemi.com/datasheets/ND/NDS331N.pdf
+BrVOA1 +BrVOB1 -BrVOA1 -BrVOB1 GND GND1 GND2 IBAT1 TankIn+ TankIn- TEMP1 V3.3 V5V Vin VOUT1: library part TestPinSingle
Bobbin1: library part Bobbin
BT1 BT2 BT3 JTAG1 JTAG2 JTAG3 UART1 UART2 UART3: library part "6 pin Terminal", "6 pin Terminal", ComponentLink1=http://www.digikey.com/product-detail/en/te-connectivity-amp-connectors/3-644456-6/A31116-ND/698348
C1 C5 C25 C26 C27 C28 C29 C34 C35 C36 C37 C38 C39 C40 Cu5 Cu10 Cu11 Cu17 Cu22 Cu23: library part Cap_1206, "CAP, CERM, 1206", Cap_Case=1206, CompType=Capacitor, MountType=SMT, Polarized=N, Published=2015-08-22, Publisher=YiouHe, RoHS=Y, SymbolVersion=2015-08-22, U/M=EA
C2 C3 C7 C19 C20 C21 C22 C24 C31 Cu3 Cu15: library part Cap_0402, "CAP, CERM, 0402", Cap_Case=0603, CompType=Capacitor, MountType=SMT, Polarized=N, Published=2015-08-22, Publisher=YiouHe, RoHS=Y, SymbolVersion=2015-08-22, U/M=EA
C4 C16 C17 C18 C30 C33 C41: library part Cap_0603, "CAP, CERM, 0603", Cap_Case=0603, CompType=Capacitor, MountType=SMT, Polarized=N, Published=2015-08-22, Publisher=YiouHe, RoHS=Y, SymbolVersion=2015-08-22, U/M=EA
C6 C23: library part Cap_0805, "CAP, CERM, 0805", Cap_Case=0805, CompType=Capacitor, MountType=SMT, Polarized=N, Published=2015-08-22, Publisher=YiouHe, RoHS=Y, SymbolVersion=2015-08-22, U/M=EA
C8 C9 C10 C11 C13 C14: library part Cap_2220, "CAP, CERM, 2220", Cap_Case=2220, CompType=Capacitor, MountType=SMT, Polarized=N, Published=2015-08-22, Publisher=YiouHe, RoHS=Y, SymbolVersion=2015-08-22, U/M=EA
C12 C15: "Capacitor", PackageDescription="Capacitor; 2 Leads", PackageReference=CAPR5-4X5, Published=23-Sep-2002, Publisher="Altium Limited"
CardEdge1 GoldFinger1: library part CardEdge20Pin, "3M 20 pin card edge, SPD08-020-RB-TR", ComponentLink=https://www.digikey.com/products/en?keywords=3M10682CT-ND
Cblock1 Cr1: library part Cap_1206_1210, "CAP, CERM, 1206 or 1210", Cap_Case=1210, CompType=Capacitor, MountType=SMT, Polarized=N, Published=2015-08-22, Publisher=YiouHe, RoHS=Y, SymbolVersion=2015-08-22, U/M=EA
Cu1 Cu2 Cu6 Cu8 Cu9 Cu12 Cu13 Cu14 Cu18 Cu20 Cu21 Cu24: library part Cap_0402, "CAP, CERM, 0402", Cap_Case=0402, CompType=Capacitor, MountType=SMT, Polarized=N, Published=2015-08-22, Publisher=YiouHe, RoHS=Y, SymbolVersion=2015-08-22, U/M=EA
Cu4 Cu7 Cu16 Cu19: library part Cap_0603_0805, "0603 or 0805", Cap_Case=0603, CompType=Capacitor, MountType=SMT, Polarized=N, Published=2015-08-22, Publisher=YiouHe, RoHS=Y, SymbolVersion=2015-08-22, U/M=EA
Du1 Du2: library part "Diode SBR1U400P1", "SBR1U400P1", ComponentLink1Description="Manufacturer Link", ComponentLink1URL=http://www.digikey.com/product-detail/en/ES1D/ES1DFSCT-ND/458940, PackageDescription="Diode, pad 5.49x1.67 mm (LxW. max)", PackageReference=2106, Published=8-Sept-2015, Publisher="Altium Limited"
Fuse1: library part Fuse, "Fuse", ComponentLink1=http://www.digikey.com/scripts/DkSearch/dksus.dll?Detail&itemSeq=195945201&uq=635977101282764137
L1 Lr1: "ResonantInd", Code_IEC=1005, Code_JEITA=0402, LatestRevisionDate=29-May-2009, LatestRevisionNote="IPC-7351 Footprint Added.", PackageDescription="Chip Inductor", PackageReference=0402-A, Published=8-Jun-2000, Publisher="Altium Limited"
L2: library part L0805, "Chip Inductor"
L3: library part L0603, "Chip Inductor"
LogicB1 PLED1 PtoHV1 PtoLED1 PtoRC1: library part "4 pin Terminal", "4 pin Terminal", ComponentLink1=http://www.digikey.com/product-detail/en/te-connectivity-amp-connectors/3-644456-6/A31116-ND/698348
MainB1 PVBAT1 TC1: library part "2 pin Terminal", "2 pin Terminal", ComponentLink1=http://www.digikey.com/scripts/DkSearch/dksus.dll?Detail&itemSeq=195945201&uq=635977101282764137
Q1 Q2 Q3 Q4 Q5 Q6 Q7 Q8: library part GS66504B, "GAN TRANS E-MODE 650V"
R1 R2 R3 R4 R5 R6 R7 R8 R9 R10 R11 R12 R13 R14 R15 R16 R17 R18 R19 R20 R21 R22 R23 R24 R25 R26 R27 R28 R29 R30 R31 R32 R33 R34 R35 R36 R37 R38 R39 R40 R41 R42 R43 R44 R45 R46 R47 R48 R49 RBLUE1 Rgreen1 Rrc1 Rred1 Ru1 Ru2 Ru5 Ru6 Ru7 Ru10 Ru11 Ru14 Ru15 Ru16 RWhite1: "Resistor", LatestRevisionNote="Re-released for DXP Platform.", PackageDescription="SMD resistor", Published=8-Sept-2015, Publisher="Altium Limited"
  R1 R2 R3 R4 R5 R6 R8 R9 R10 R12 R13: PackageReference=0402
  R7 R11 R14 R15 R16 R17 R18 R19 R20 R21 R22 R23 R24 R25 R26 R27 R28 R29 R30 R31 R32 R33 R34 R35 R36 R37 R38 R39 R40 R41 R42 R43 R44 R45 R46 R47 R48 R49 RBLUE1 Rgreen1 Rrc1 Rred1 Ru1 Ru2 Ru5 Ru6 Ru7 Ru10 Ru11 Ru14 Ru15 Ru16 RWhite1: PackageReference=0603
U1: library part ACS712, "Hall Sensor IC (6 x 5mm)", Package=SOIC8, Bandwidth="80 kHz", ComponentLink1Description="Manufacurer link", ComponentLink1URL=http://www.allegromicro.com/en/Products/Current-Sensor-ICs/Zero-To-Fifty-Amp-Integrated-Conductor-Sensor-ICs/ACS712.aspx, ComponentLink2Description=Digikey, ComponentLink2URL=http://www.digikey.com/product-detail/en/allegro-microsystems-llc/ACS712ELCTR-05B-T/620-1189-1-ND/1284606, SubFamily="Hall effect current sensor", Vin (V)="5 V"
U2: "Imported", Manufacturer_Part_Number=ada4691-4acpz-r2, C="Copyright (C) 2015 Accelerated Designs. All rights reserved", Copyright="Copyright (C) 2015 Accelerated Designs. All rights reserved", RefDes=RefDes, Type=Type, Vendor=ANALOG
U3: "SMD Gyroscope/Accelerometer/Magnetometer Sensor; 9-AXIS", Package="QFN-24 InvenSense", Availability=Good, MF=InvenSense, MP=MPU-9250, Price="7.52 USD"
U4 U13 U15 U17: "eGaN Gate Driver with LDO", MFG="Texas Instruments", MFGPN=UCC27611DRV, PCBfootprint=WSON-6
U5: library part TLV341_DBV_6, "Imported", Manufacturer="Texas Instruments", Manufacturer_Part_Number=tlv341_dbv_6, PACKAGE_DESIGNATOR=DBV, Datasheet URL=http://www.ti.com/lit/gpn/TLV341, FAMILY_NAME="STANDARD LINEAR AMPLIFIER", GENERIC_PART_NUMBER=TLV341, INDUSTRY_STD_PKG_TYPE=SOT-23, PIN_COUNT=6, RefDes=RefDes, Type=Type, Vendor="Texas Instruments"
U6 U14 U16 U18: library part ISO721_D_8, "Imported", Manufacturer="Texas Instruments", Manufacturer_Part_Number=iso721_d_8, PACKAGE_DESIGNATOR=D, Datasheet URL=http://www.ti.com/lit/gpn/ISO721, FAMILY_NAME=ISOLATOR, GENERIC_PART_NUMBER=ISO721, INDUSTRY_STD_PKG_TYPE=SOIC, PIN_COUNT=8, RefDes=RefDes, Type=Type, Vendor="Texas Instruments"
U7 U10: library part "DRDC3105, Relay driver", "DRDC3105, Relay driver", ComponentLink=http://www.digikey.com/product-detail/en/diodes-incorporated/DRDC3105F-7/DRDC3105F-7DICT-ND/3028441
U8 U11: library part PLVA650A, "Zener Diode 5V", Manufacturer_Part_Number=plva650a, C="Copyright (C) 2015 Accelerated Designs. All rights reserved", Copyright="Copyright (C) 2015 Accelerated Designs. All rights reserved", RefDes=RefDes, Type=Type, Vendor=NXP
U9: library part "Relay PB1171CT-ND", "Relay PB1171CT-ND 5A", =http://www.digikey.com/scripts/DkSearch/dksus.dll?Detail&itemSeq=198450494&uq=636002034444156379
U12: library part "Relay PB1247CT-ND", "Relay PB1247CT-ND 2A", =http://www.digikey.com/scripts/DkSearch/dksus.dll?Detail&itemSeq=198450494&uq=636002034444156379
U19: "Imported", Manufacturer_Part_Number=lt6654ahs6-1.25#trmpbf, RefDes=RefDes, Type=Type, Vendor="Linear Technology"
U20: "Imported", RefDes=RefDes, Type=Type
U21: library part AP2112, "AP2112, LDO", ComponentLink=http://www.digikey.com/scripts/DkSearch/dksus.dll?Detail&itemSeq=196056318&uq=635977843130932286
U22: library part CY15B104Q, "CY15B104Q, Cypress, 4MB, F-Ram"
U24: "Adjustable PS", Manufacturer="Texas Instruments", PartNumber=TPS61020DRC, CompType=IC, MountType=SMT, PackageReference=DRC0010A, PIN_COUNT=11, RefDes=RefDes, RoHS=Y, Type=TYPE
U26: "MicroChip High Speed PWM MCU", Manufacturer=Microchip, Package="64-pin TQFN, Body 10x10 mm, pitch 0.5 BSC", ComponentLink1Description="Digikey link", ComponentLink1URL=http://www.digikey.com/product-detail/en/microchip-technology/DSPIC33FJ64GS610-50I%2FPF/DSPIC33FJ64GS610-50I%2FPF-ND/3046584, ComponentLink2Description=Datasheet, ComponentLink2URL=http://ww1.microchip.com/downloads/en/DeviceDoc/70000591f.pdf, DatasheetVersion=DS7000591F, PartNumber=dsPIC33FJ64GS606, SubFamily=Microcontroller, Vin (V)="3 - 3.6 V"
ULED1: library part "LED light 00137402", "Multi color LED", ComponentLink=http://www.osram-os.com/Graphics/XPic7/00137402_0.pdf
U23: ComponentLink=http://www.digikey.com/product-detail/en/broadcom-limited/HCPL-0931/516-2702-5-ND/969355

## Free pads (board coordinates)
  round 0 hole 145.67 paste+0 mask+0: 3(160,480) 3(1800,480)
  round 0 hole 145.67: 3(1620,2856) 3(3025,2115)
  round 0 hole 25: 5(3220,1237.12) 5(3220,1273.72) 5(3220,1310.31) 5(3220,1346.91) 5(3220,1383.5) 5(3220,1420.1) 5(3220,1456.69) 5(3220,1493.29) 5(3220,1529.89) 5(3220,1566.48) 5(3220,1603.08) 5(3220,1639.67) 5(3220,1676.27) 5(3220,1712.86) 5(3220,1749.46) 5(3220,1786.06) 5(3220,1822.65) 5(3220,1859.25) 5(3220,1895.84) 5(3220,1932.44) 5(3220,1969.04) 5(3220,2005.63) 5(3220,2042.23) 5(3220,2078.82) 5(3220,2115.42) 5(3220,2152.01) 5(3220,2188.61) 5(3220,2225.21) 5(3220,2261.8) 5(3220,2298.4) 5(3220,2334.99) 5(3220,2371.59) 5(3220,2408.19) 5(3220,2462.39) 5(3220,2498.98) 5(3220,2535.58) 5(3220,2572.17) 5(3220,2608.77) 5(3220,2645.36) 5(3220,2681.96) 5(3220,2718.56) 5(3220,2755.15) 5(3220,2791.75) 5(3220,2847.33) 5(3220,2883.93) 5(3220,2920.53) 5(3220,2957.12) 5(3220,2993.72) 5(3220,3030.31) 5(3220,3066.91) 5(3220,3103.51) 5(3220,3140.1) 5(3220,3176.7) 5(3220,3213.29) 5(3220,3249.89) 5(3220,3286.48) 5(3220,3323.08) 5(3220,3359.68) 5(3220,3396.27) 5(3220,3432.87) 5(3220,3469.46) 5(3220,3506.06) 5(3220,3542.65) 5(3220,3579.25) 5(3220,3615.85) 5(3220,3652.44) 5(3220,3689.04) 5(3220,3725.63) 5(3220,3762.23) 5(3220,3798.83) 5(3220,3835.42) 5(3220,3872.02) 5(3220,3908.61) 5(3220,3945.21) 5(3220,3981.8) 5(3220,4018.4) 5(3220,4055) 5(3267,650) 5(3272,1293) 5(3279,2565) 5(3281.74,1944) 5(3292,2977) 5(3303.2,650) 5(3308.2,1293) 5(3317,2565) 5(3317.14,1944) 5(3327,2976) 5(3339.41,650) 5(3344.41,1293) 5(3350,1987.7) 5(3350,2023.44) 5(3350,2059.18) 5(3350,2094.93) 5(3350,2130.67) 5(3350,2166.41) 5(3350,2202.15) 5(3350,2237.89) 5(3350,2273.63) 5(3350,2309.38) 5(3350,2345.12) 5(3350,2380.86) 5(3350,2416.6) 5(3350,2452.34) 5(3350,2488.09) 5(3350,2523.83) 5(3352,1944) 5(3352,2564) 5(3363,2977) 5(3375.61,650) 5(3380.61,1293) 5(3388,1944) 5(3388,2565) 5(3401.4,2978) 5(3411.82,650) 5(3416.82,1293) 5(3423.76,1944) 5(3426.4,2566) 5(3436.79,2978) 5(3448.02,650) 5(3453.02,1293) 5(3459.53,1944) 5(3461.79,2566) 5(3472.19,2978) 5(3484.22,650) 5(3489.22,1293) 5(3495.29,1944) 5(3497.19,2566) 5(3507.58,2978) 5(3520.43,650) 5(3525.43,1293) 5(3531.06,1944) 5(3532.58,2566) 5(3542.98,2978) 5(3556.63,650) 5(3561.63,1293) 5(3566.82,1944) 5(3567.98,2566) 5(3578.37,2978) 5(3592.84,650) 5(3597.84,1293) 5(3602.58,1944) 5(3603.37,2566) 5(3613.77,2978) 5(3629.04,650) 5(3634.04,1293) 5(3638.35,1944) 5(3638.77,2566) 5(3649.16,2978) 5(3665.24,650) 5(3670.24,1293) 5(3674.11,1944) 5(3674.16,2566) 5(3684.56,2978) 5(3701.45,650) 5(3706.45,1293) 5(3709.56,2566) 5(3709.87,1944) 5(3719.95,2978) 5(3737.65,650) 5(3742.65,1293) 5(3744.95,2566) 5(3745.64,1944) 5(3755.35,2978) 5(3773.85,650) 5(3778.85,1293) 5(3780.35,2566) 5(3781.4,1944) 5(3790.74,2978) 5(3810.06,650) 5(3815.06,1293) 5(3815.74,2566) 5(3817.17,1944) 5(3826.14,2978) 5(3846.26,650) 5(3851.14,2566) 5(3851.26,1293) 5(3861.06,1946) 5(3861.53,2978) 5(3882.47,650) 5(3886.53,2566) 5(3887.47,1293) 5(3896.35,2978) 5(3896.82,1946)

## Via types
v1: diameter 25, hole 15, Top Layer to Bottom Layer, 625 vias
v2: diameter 30, hole 15, Top Layer to Bottom Layer, 30 vias

## Nets (pads, with @x,y where several pads share a name; then routed paths per layer and width w, separated by ;. In a path a pad name is that pad's centre, name@x,y a point inside that pad or via, vN(x,y) a via of type N, cw(c..) or ccw(c..) an arc to the next point about the centre after c; other vN are vias at no path point)
200VON: PtoLED1.1 U26.52 | length 1228.1
  Bottom Layer w8: U26.52@943,2809.42 829.58,2809.42 761,2878 761,3465 959,3663 1033,3663 1060,3690 1060,3720 PtoLED1.1@1066,3726
200VON_LED: 1.3 PLED1.4 | length 97.1
  Top Layer w20: PLED1.4@3479,2467 3524,2512 3549,2512 1.3@3555,2506
+BRDN1: Q7.G Q8.G Ru6.2 Ru7.2 | length 510.7
  Top Layer w20: Q8.G@2654,1178 2731,1178 2748,1195 2748,1409 2678.86,1478.14 Q7.G@2657,1478.14 ; 2755,1293 Ru7.2@2793,1293 Ru6.2@2831,1293
+BRSIGDN: R19.1 R45.1 U26.60 | length 5345.2
  Top Layer w15: v1@839,2971 v1(839,2974) 839,3071 v1@871,3103
  Bottom Layer w10: v1(839,2974) 846,2967 942.9,2967 U26.60@943,2966.9
  Bottom Layer w15: v1@880,3110 896,3126 896,3470 987,3561 1234,3561 1703,4030 3071,4030 3145,3956 3145,2466 3146,2465 ; v1@2940,1879 2981,1879 3145,2043 3145,2465
  Bottom Layer w20: 899,3186 900,3185 R45.1@927,3185
  other v1: 2943,1880 878,3111
+BRSIGUP: R14.1 R44.1 U26.61 | length 7217
  Bottom Layer w10: 834,3023 870.42,2986.58 U26.61@943,2986.58
  Bottom Layer w15: 834,3023 834,3441 978,3585 1223,3585 1693,4055 3079,4055 3170,3964 3170,1250 2789,869 2235,869 2155,789 ; v1(2063,789) 2147.5,789 ; 2148,789 2155,789 ; 2154,788 2155,789 ; 2160,789 2155,789
  Bottom Layer w20: 836,3184 R44.1@865,3184
+BRUP1: Q1.G Q2.G Ru1.2 Ru2.2 | length 403.4
  Top Layer w20: Q2.G@2229,1197 2133,1293 Ru2.2@2133,1350 2133,1372 Ru1.2@2133,1391 2133,1426 2221,1514 Q1.G@2231.14,1514
+BRVDDA: Cu2.1 Cu3.1 Cu4.1 Du1.K U4.1 U6.8 | length 54.9
  Top Layer w12: Cu2.1@1947.86,1254.86 1949.63,1254.83 1949.7,1254.83 1972.7,1254.43 1983.92,1254.23 1986.97,1257.18 U4.1@1997.5,1267.34
+BRVOA: +BrVOA1.0 Cu6.1 R15.2 U4.3 | length 90.3
  Top Layer w12: U4.3@2048.67,1266.45 2067,1248.12 Cu6.1@2067,1219
  Top Layer w20: Cu6.1@2069,1218.63 2069.63,1218 R15.2@2104,1218
+BRVOB: +BrVOB1.0 Cu12.1 R20.2 U13.3 | length 92.4
  Top Layer w12: Cu12.1@2784,1498 2786,1500 Cu12.1@2786,1501 R20.2@2786,1540 ; Cu12.1@2786,1497 2799.93,1483.07 U13.3@2799.93,1453.24
-BRDN1: Q5.G Q6.G Ru15.2 Ru16.2 | length 510.4
  Top Layer w20: 2746,2321 Ru16.2@2788,2321 Ru15.2@2827,2321
  Top Layer w25: Q6.G@2657.26,2524.14 2682.86,2524.14 2746,2461 2746,2321 ; Q5.G@2673,2205 2728,2205 2731,2202 2746,2217 2746,2311
-BRSIGDN: R28.1 R42.1 U26.63 | length 4120.6
  Bottom Layer w10: 896,3070 896,3038 908.05,3025.95 U26.63@943,3025.95
  Bottom Layer w15: 896,3070 960,3134 960,3498 999,3537 1242,3537 1713,4008 3060,4008 3114,3954 3114,2978 3011,2875 v1@2968,2875
  Bottom Layer w20: 962,3186 964,3184 R42.1@991,3184
  other v1: 2967,2874
-BRSIGUP: R24.1 R43.1 U26.62 | length 1117
  Top Layer w15: v1@877,3012 879,3014 v1@879,3015 ; v1(879,3016) v1@879,3015 ; R24.1@1601,2459 1598,2462 1598,2597 1523,2672 1397,2672 1056.5,3012.5 1052,3008 889,3008 881,3016 880,3016 v1@879,3015
  Bottom Layer w10: v1(879,3016) 875,3012 881,3006 942.73,3006 U26.62@943,3006.27
-BRUP1: Q3.G Q4.G Ru10.2 Ru11.2 | length 363.2
  Top Layer w20: Q3.G@2230,2566 2177,2513 2177,2394 2177,2301.31 Q4.G@2231.14,2247.17
-BRVDDA: Cu14.1 Cu15.1 Cu16.1 Du2.K U15.1 U16.8
-BRVOA: -BrVOA1.0 Cu18.1 R25.2 U15.3
-BRVOB: -BrVOB1.0 Cu24.1 R29.2 U17.3
AN_IBAT: IBAT1.0 R5.2 U2.15 U26.13 | length 1670.8
  Bottom Layer w10: U26.13@1254,3133 1253,3134 1253,3174 1358,3279 1358,3617 1726,3985 2243,3985 2264,3964 R5.2@2264,3937 ; U2.15@2255.02,3892.34 2255.02,3927.02 R5.2@2265,3937
  other v1: 1499,3744
AN_TEMP: R10.1 TEMP1.0 U2.14 U26.15 | length 1582.8
  Top Layer w12: 1490,3596 1592,3698 1592,3846 1695,3949 TEMP1.0@1764,3949
  Bottom Layer w10: v1@1761.5,3945.5 1783,3967 2221,3967 2229,3959 R10.1@2229,3938 ; R10.1@2229,3937 R10.1@2229,3938 ; U2.14@2235.34,3892.34 2235.34,3931.66 R10.1@2229,3938
  Bottom Layer w12: U26.15@1292,3142 1292,3159 1400,3267 1400,3512.37 1476.63,3589 v1(1479,3589)
  other v1: 1765,3951
AN_VBAT: U2.4 U2.5 U26.16 | length 1388.7
  Bottom Layer w10: U26.16@1312,3118 1312,3147 1421,3256 1421,3470 1578,3627 2174,3627 2284,3737 ; 2284,3736 2284,3737 ; 2284,3754 2284,3737
AN_VOUT: U2.8 U2.9 U26.14 VOUT1.0 | length 1407.4
  Bottom Layer w10: U26.14@1272,3138 1272,3167 1379,3274 1379,3574
  Bottom Layer w12: 1379,3574 1453,3648 2084,3648 2181,3745 ; 2181,3744 2181,3745 ; 2188,3780 2188,3752 2181,3745 ; U2.8@2215.65,3762.65 U2.8@2215.65,3777.98
  other v1: 1419,3602
BT_DSR: GoldFinger1.1 U26.21 | length 2668
  Bottom Layer w10: GoldFinger1.1@602,4014 602,2781 887,2496 1342,2496 1467,2621 1467,2918 1419.72,2965.28 1385,2965.28 U26.21@1385,2966.9
BT_DSR_CE: BT1.4 CardEdge1.1 | length 805.8
  Top Layer w20: BT1.4@3373,3664 3301,3664 3255,3618 3255,3135 3316,3074 3390,3074 CardEdge1.1@3408,3092
BT_DTR: GoldFinger1.2 U26.29 | length 2418.5
  Bottom Layer w10: GoldFinger1.2@634,3978 634,3936 623,3925 623,2787.97 897.41,2515 1336,2515 1449,2628 1449,2792 1431,2810 U26.29@1382,2810
BT_DTR_CE: BT1.0 CardEdge1.2 | length 434.8
  Top Layer w20: v1(3439,3064) CardEdge1.2@3439,3110
  Bottom Layer w20: BT1.0@3372,3429 3372,3224 3439,3157 v1@3439,3068
BT_RX: GoldFinger1.4 U26.32 | length 2189.1
  Bottom Layer w10: GoldFinger1.4@697,3991 697,3934 662,3899 662,2809 921,2550 1320,2550 1385,2615 U26.32@1385,2750.36
BT_RX_CE: BT1.1 CardEdge1.4 | length 549.6
  Top Layer w12: 3308,3276 3387,3197 3459,3197 3502.02,3153.98 CardEdge1.4@3502.02,3115.14
  Top Layer w20: 3308,3280 3308,3478 3318.06,3488.06 BT1.1@3372,3488.06
BT_TX: GoldFinger1.3 U26.31 | length 2318.2
  Bottom Layer w10: GoldFinger1.3@666,3989 666,3935 642,3911 642,2799 908,2533 1327,2533 1433,2639 1433,2760 1422.95,2770.05 U26.31@1385,2770.05
BT_TX_CE: BT1.2 CardEdge1.3 | length 651.1
  Top Layer w12: 3282,3217 3327,3172 3448,3172 3470.53,3149.47 CardEdge1.3@3470.53,3115.14
  Top Layer w20: 3282,3221 3282,3520 3309.11,3547.11 BT1.2@3372,3547.11
CHARGECAPEN: U10.3 U26.17 | length 1210.4
  Top Layer w12: v1(1939,3039) 1952,3052 1952,3614 1965,3627 U10.3@1991,3627
  Bottom Layer w12: U26.17@1388,3046 1493,3046 1539,3000 1898,3000 v1@1938,3040
FRAM_CS*: U22.1 U26.8 | length 430.5
  Top Layer w10: v1(1175,3231) 1175,3232 1275,3332 1275,3447 v1@1238,3484
  Bottom Layer w10: U26.8@1154.16,3119 1154.16,3188.16 1154,3188.31 1154,3210 v1(1175,3231)
  other v1: 1236,3482
FRAM_SCK: U22.6 U26.4 | length 360.7
  Bottom Layer w10: 1001,3381 U22.6@1003,3381 ; U22.6@1008,3377 U22.6@1020,3377 ; U22.6@1025,3381 U22.6@1021,3381 ; U22.6@1033,3393 U22.6@1021,3381 ; U26.4@1075.42,3119 1075.42,3149.37 1055.79,3169 1055.79,3169.21 1052,3173 1052,3222 984,3290 984,3362 U22.6@1003,3381 ; U22.6@1003,3381 U22.6@1021,3381
FRAM_SI: U22.5 U26.6 | length 260.8
  Bottom Layer w10: U22.5@1023,3333 U22.5@1025.4,3333 ; U22.5@1025,3326 U22.5@1027,3328 ; U22.5@1027,3334 U22.5@1027,3328 ; U22.5@1029,3330 U22.5@1027,3328 ; U22.5@1031,3330 1115,3246 1115,3158.43 1114.79,3158.21 U26.6@1114.79,3119 U26.6@1114.19,3119.6
FRAM_SO: U22.2 U26.5 | length 528.2
  Top Layer w12: 1081,3321 1082,3259 ; 1113,3353 1194,3434 v1@1239,3434 ; 1115,3355 1082,3322 1082,3259 ; 1082,3259 1082,3198 1083,3197 1082,3259
  Bottom Layer w10: v1@1084,3195 1095,3184 U26.5@1095,3127
  other v1: 1083,3196 1238,3433
GND: C1.2 C2.2 C3.2 C4.2 C5.2 C6.2 C7.2 C8.2 C9.2 C10.2 C11.2 C12.2 C13.2 C14.2 C15.2 C16.2 C17.2 C18.2 C19.2 C20.2 C21.1 C23.2 C24.2 C25.2 C28.2 C29.2 C30.2 C31.2 C33.2 C36.2 C37.2 C38.2 C39.1 C40.1 C41.2 Cu5.2 Cu7.2 Cu8.2 Cu9.2 Cu10.2 Cu11.2 Cu12.2 Cu17.2 Cu19.2 Cu20.2 Cu21.2 Cu22.2 Cu23.2 Cu24.2 GND1.0 GND2.0 GND.0 GoldFinger1.9 GoldFinger1.10 GoldFinger1.11 GoldFinger1.12 LogicB1.1 LogicB1.2 MainB1.1 MOSrc1.1 PtoHV1.2 PtoHV1.3 PtoHV1.4 PtoRC1.1 Q5.S Q6.S Q7.S Q8.S R2.2 R9.1 R13.1 R16.1 R17.1 R21.1 R22.1 R26.1 R27.1 R30.1 R33.1 R35.1 R39.1 R40.1 R42.2 R43.2 R44.2 R45.2 U1.5 U2.11 U2.HTAB U3.9 U3.11 U3.18 U3.20 U3.25 U5.2 U6.4 U7.1 U10.1 U13.2 U13.EP U14.4 U14.5 U14.7 U16.4 U17.2 U17.EP U18.4 U18.5 U18.7 U19.1 U19.2 U20.3 U21.2 U22.0 U22.4 U24.5 U24.8 U24.10 U24.11 U26.9 U26.20 U26.25 U26.41 | length 2569
  Top Layer w6: U3.18@769.63,3758.02 769.63,3744.37 U3.25@791,3723
  Top Layer w8: U3.20@747.98,3720.62 795.38,3720.62 U3.25@797,3719 ; U3.25@792.87,3689.13 U3.25@794,3688 ; U3.25@817,3688 818.13,3689.13 U3.9@870.02,3689.13 ; U3.25@826,3722 827.38,3720.62 U3.11@870.02,3720.62
  Top Layer w10: GoldFinger1.12@854.5,4004 854.5,3918.5 855,3918 ; U24.11@1720.63,3377.63 U24.5@1720.63,3414.12 ; U24.8@1760,3303.88 U24.11@1760,3336.36 ; U24.10@1799.37,3303.88 U24.11@1799.37,3337.63
  Top Layer w12: v1(2825.53,1411.9) U13.2@2825.53,1453.24 Cu12.2@2825.53,1500
  Top Layer w20: GoldFinger1.11@886,4004 887,4003 887,3924 ; R27.1@1599,2342 1599,2329 1612,2316 1641,2316 U16.4@1642,2315 ; v1(1638,2308) 1638,2311 U16.4@1642,2315 ; U16.4@1670,2315 U16.4@1642,2315 ; U16.4@1681,2315 1680,2316 1643,2316 U16.4@1642,2315 ; R16.1@2132,832 2133,833 2133,909 U6.4@2135,911 ; R9.1@2481,3934 2481,3882 C1.2@2494,3869 ; v1@2776,1735 2776,1781 ; v1@2794,1691 2865,1691 2889,1667 U14.7@2889,1608 ; 2808,2677 2858,2677 2893,2642 U18.7@2893,2615 ; Cu20.2@2901.82,2434.13 2901.82,2439.44 2901.82,2446 Cu21.2@2901.82,2459.44
  Top Layer w22: 2760,2875 R30.1@2828,2875
  Top Layer w25: PtoRC1.1@1352,4005 1352,3936 1370.84,3917.16 MOSrc1.1@1371.6,3917.16 ; C33.2@1668,3355 1719.6,3355 U24.11@1722.6,3358 ; U24.11@1797.4,3358 1856,3358 1896,3358 C28.2@1897,3357 ; Q6.S@2657.26,2679.14 Q6.S@2682.86,2679.14 ; 2764,2871 2769,2871 ; Cu7.2@2935.9,1411.9 Cu7.2@2938,1414
  Top Layer w30: v1(2825.53,1411.9) Cu7.2@2935.9,1411.9
  Bottom Layer w10: U26.41@1154.16,2677 1154.16,2740.16 1161,2747 ; 1157.84,3013.16 1159,3012 ; 1171,3044 1173.84,3046.84 U26.9@1173.84,3119 ; 1285,2889 1285.84,2888.16 U26.25@1385,2888.16 ; 1293,2984 1295.58,2986.58 U26.20@1385,2986.58 ; v1@1897.2,3864.8 1902.2,3864.8 v1(1904,3863)
  Bottom Layer w12: U2.11@2188,3845 2241,3845 U2.HTAB@2242,3844 ; U2.HTAB@2235.34,3819.34 U2.HTAB@2236,3820 ; C4.2@2469,3915 2471,3913 U1.5@2471,3850.3
  Bottom Layer w15: U20.3@1856.5,3864.8 v1@1897.2,3864.8
  Bottom Layer w20: C19.2@1596,3238 1596,3199 U21.2@1602,3193 ; U5.2@1634,3460 1634,3384 R35.1@1635,3383 ; R33.1@2082,3720 2083,3721 2083,3743 ; 2085,3743 C24.2@2085,3766
  Bottom Layer w25: U22.0@1121,3353 1141,3333 U22.4@1238,3333 ; C41.2@1331.88,3919 1331.88,3989.88 PtoRC1.1@1348,4006
  other v1: 2146,872 2146,945 2631,998 2604,1221 2630,1221 2656,1221 2681,1221 2604,1246 2630,1246 2656,1246 2681,1246 2604,1271 2630,1271 2656,1271 2681,1271 2604,1296 2630,1296 2656,1296 2681,1296 2604,1321 2630,1321 2656,1321 2681,1321 2604,1346 2656,1346 2681,1346 2630,1347 2604,1521 2630,1521 2656,1521 2604,1546 2630,1546 2656,1546 2604,1571 2630,1571 2656,1571 2604,1596 2630,1596 2656,1596 2784,1598 2604,1621 2630,1621 2656,1621 2784,1630.29 2604,1646 2656,1646 2630,1647 2784,1662.57 2784,1694.86 2784,1727.14 2784,1759.43 2784,1791.71 2784,1824 2602,2261 2628,2261 2654,2261 2680,2261 2602,2286 2628,2286 2654,2286 2680,2286 1710,2308 2602,2311 2628,2311 2654,2311 2680,2311 2602,2336 2628,2336 2654,2336 2680,2336 2602,2361 2628,2361 2654,2361 2680,2361 2602,2386 2654,2386 2680,2386 2628,2387 2826.82,2444.44 2900,2446 2629,2593 2655,2593 2681,2593 2707,2593 2733,2593 2759,2593 2785,2593 2629,2618 2655,2618 2681,2618 2707,2618 2733,2618 2759,2618 2785,2618 2629,2643 2655,2643 2681,2643 2707,2643 2733,2643 2759,2643 2785,2643 2629,2668 2655,2668 2681,2668 2707,2668 2733,2668 2759,2668 2785,2668 2655,2693 2681,2693 2733,2693 2759,2693 2629,2694 2707,2694 2785,2694 2629,2723 2655,2723 2681,2723 2707,2723 2733,2723 2759,2723 2785,2723 1172,2740 1208,2740 2629,2748 2655,2748 2681,2748 2707,2748 2733,2748 2759,2748 2785,2748 2629,2773 2655,2773 2681,2773 2707,2773 2733,2773 2759,2773 2785,2773 2629,2798 2655,2798 2681,2798 2707,2798 2733,2798 2759,2798 2785,2798 1317,2852 1022,2855 1317,2883 1022,2887 1317,2980 1110,3011 1316,3013 1611,3050 1194,3053 1163,3054 1774,3107 865,3230 927,3232 992,3233 1989,3244 1886,3340 1856,3341 1593,3345 1565,3346 1856,3371 1885,3371 1564,3375 1593,3375 1635,3446 1101,3469 2192,3479 1634,3486 2193,3505 2193,3533 1990,3551 1670,3679 1698,3679 793,3682 823,3682 2084,3713 793,3715 823,3715 1706,3749 1735,3749 1763,3749 2261,3820 2229,3821 2229,3852 2261,3852 2473,3884 869,3900 2099,3922 869,3932
  other v2: 3029,3757 3029,3801.67 3029,3846.33 3029,3891
GND_CE: BT1.5 C27.2 C34.1 C35.2 CardEdge1.9 CardEdge1.10 CardEdge1.11 CardEdge1.12 JTAG1.3 U23.5 | length 101.5
  Bottom Layer w20: JTAG1.3@3752,3548 3828,3548 C34.1@3846,3566
  other v1: 3695,3108 3695,3137 3666,3164 3695,3166 3695,3196 3667,3197 3695,3226 3694,3255 3630,3576 3630,3604
GND_LED: 1.1 HVON1.1 LogicON1.1 PVBAT1.2 TBDON1.1 ULED1.9